# Allegro board Project1.brd
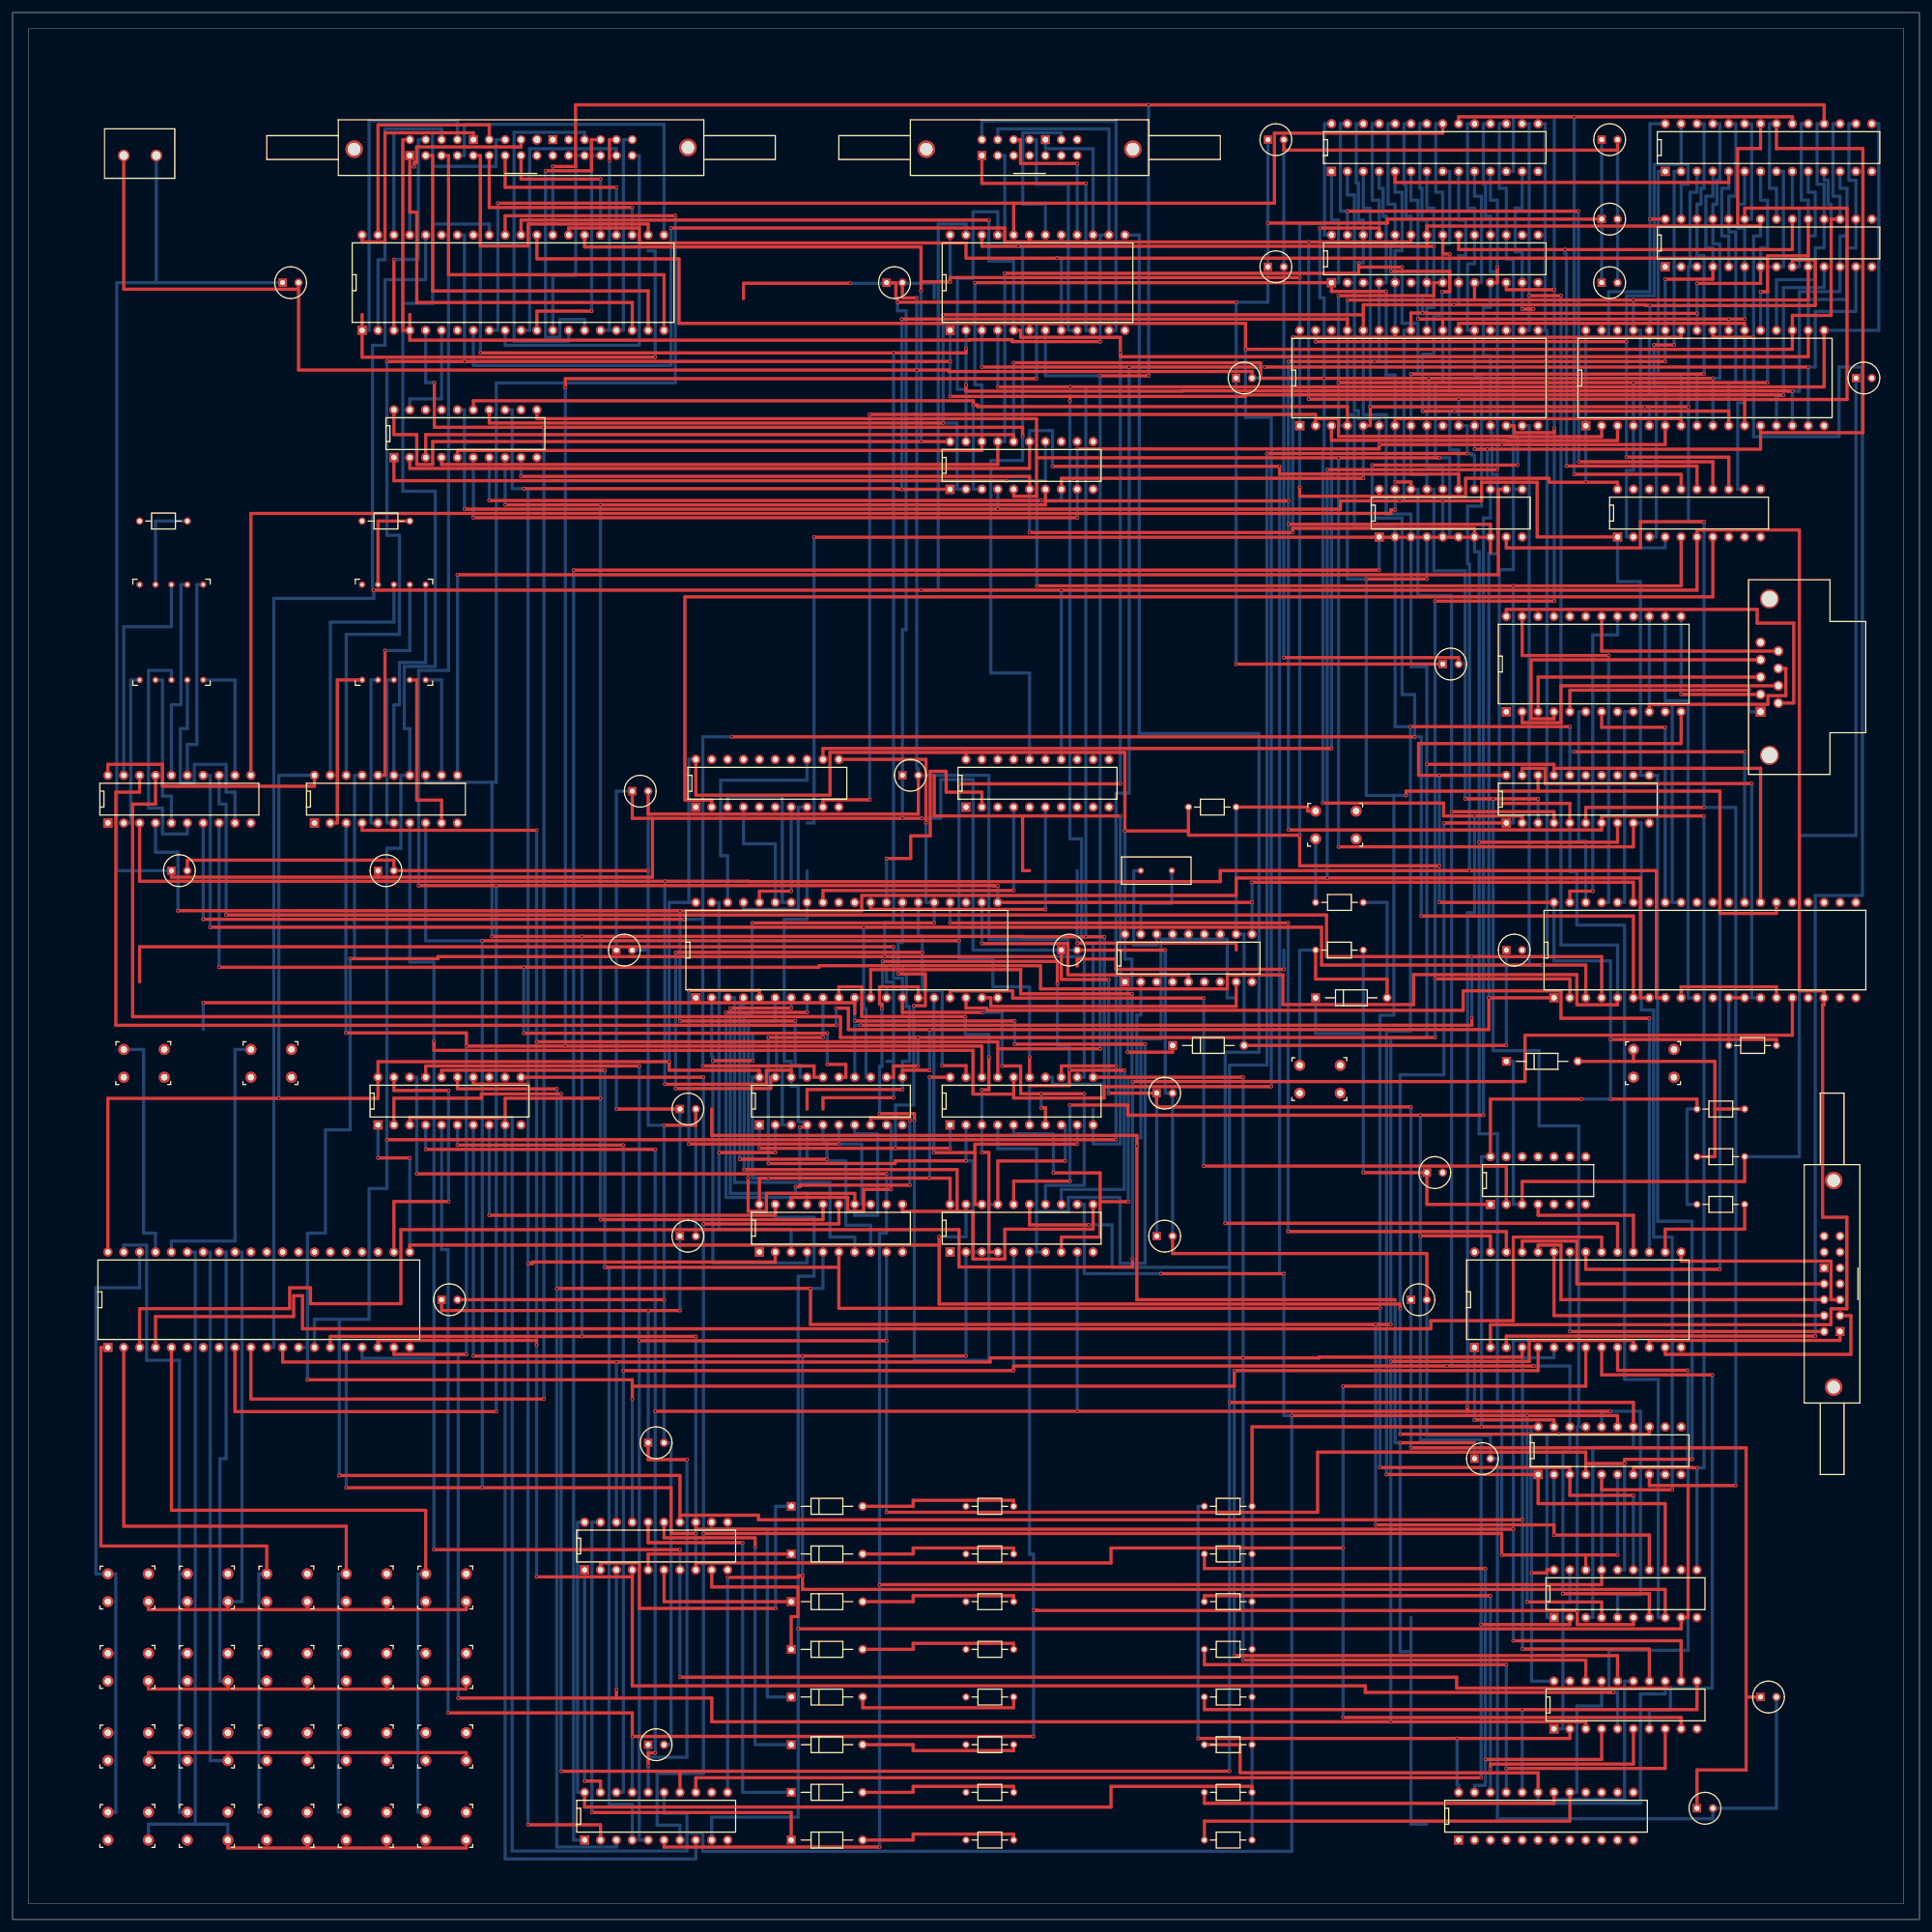
[diagram p0: board, top side]
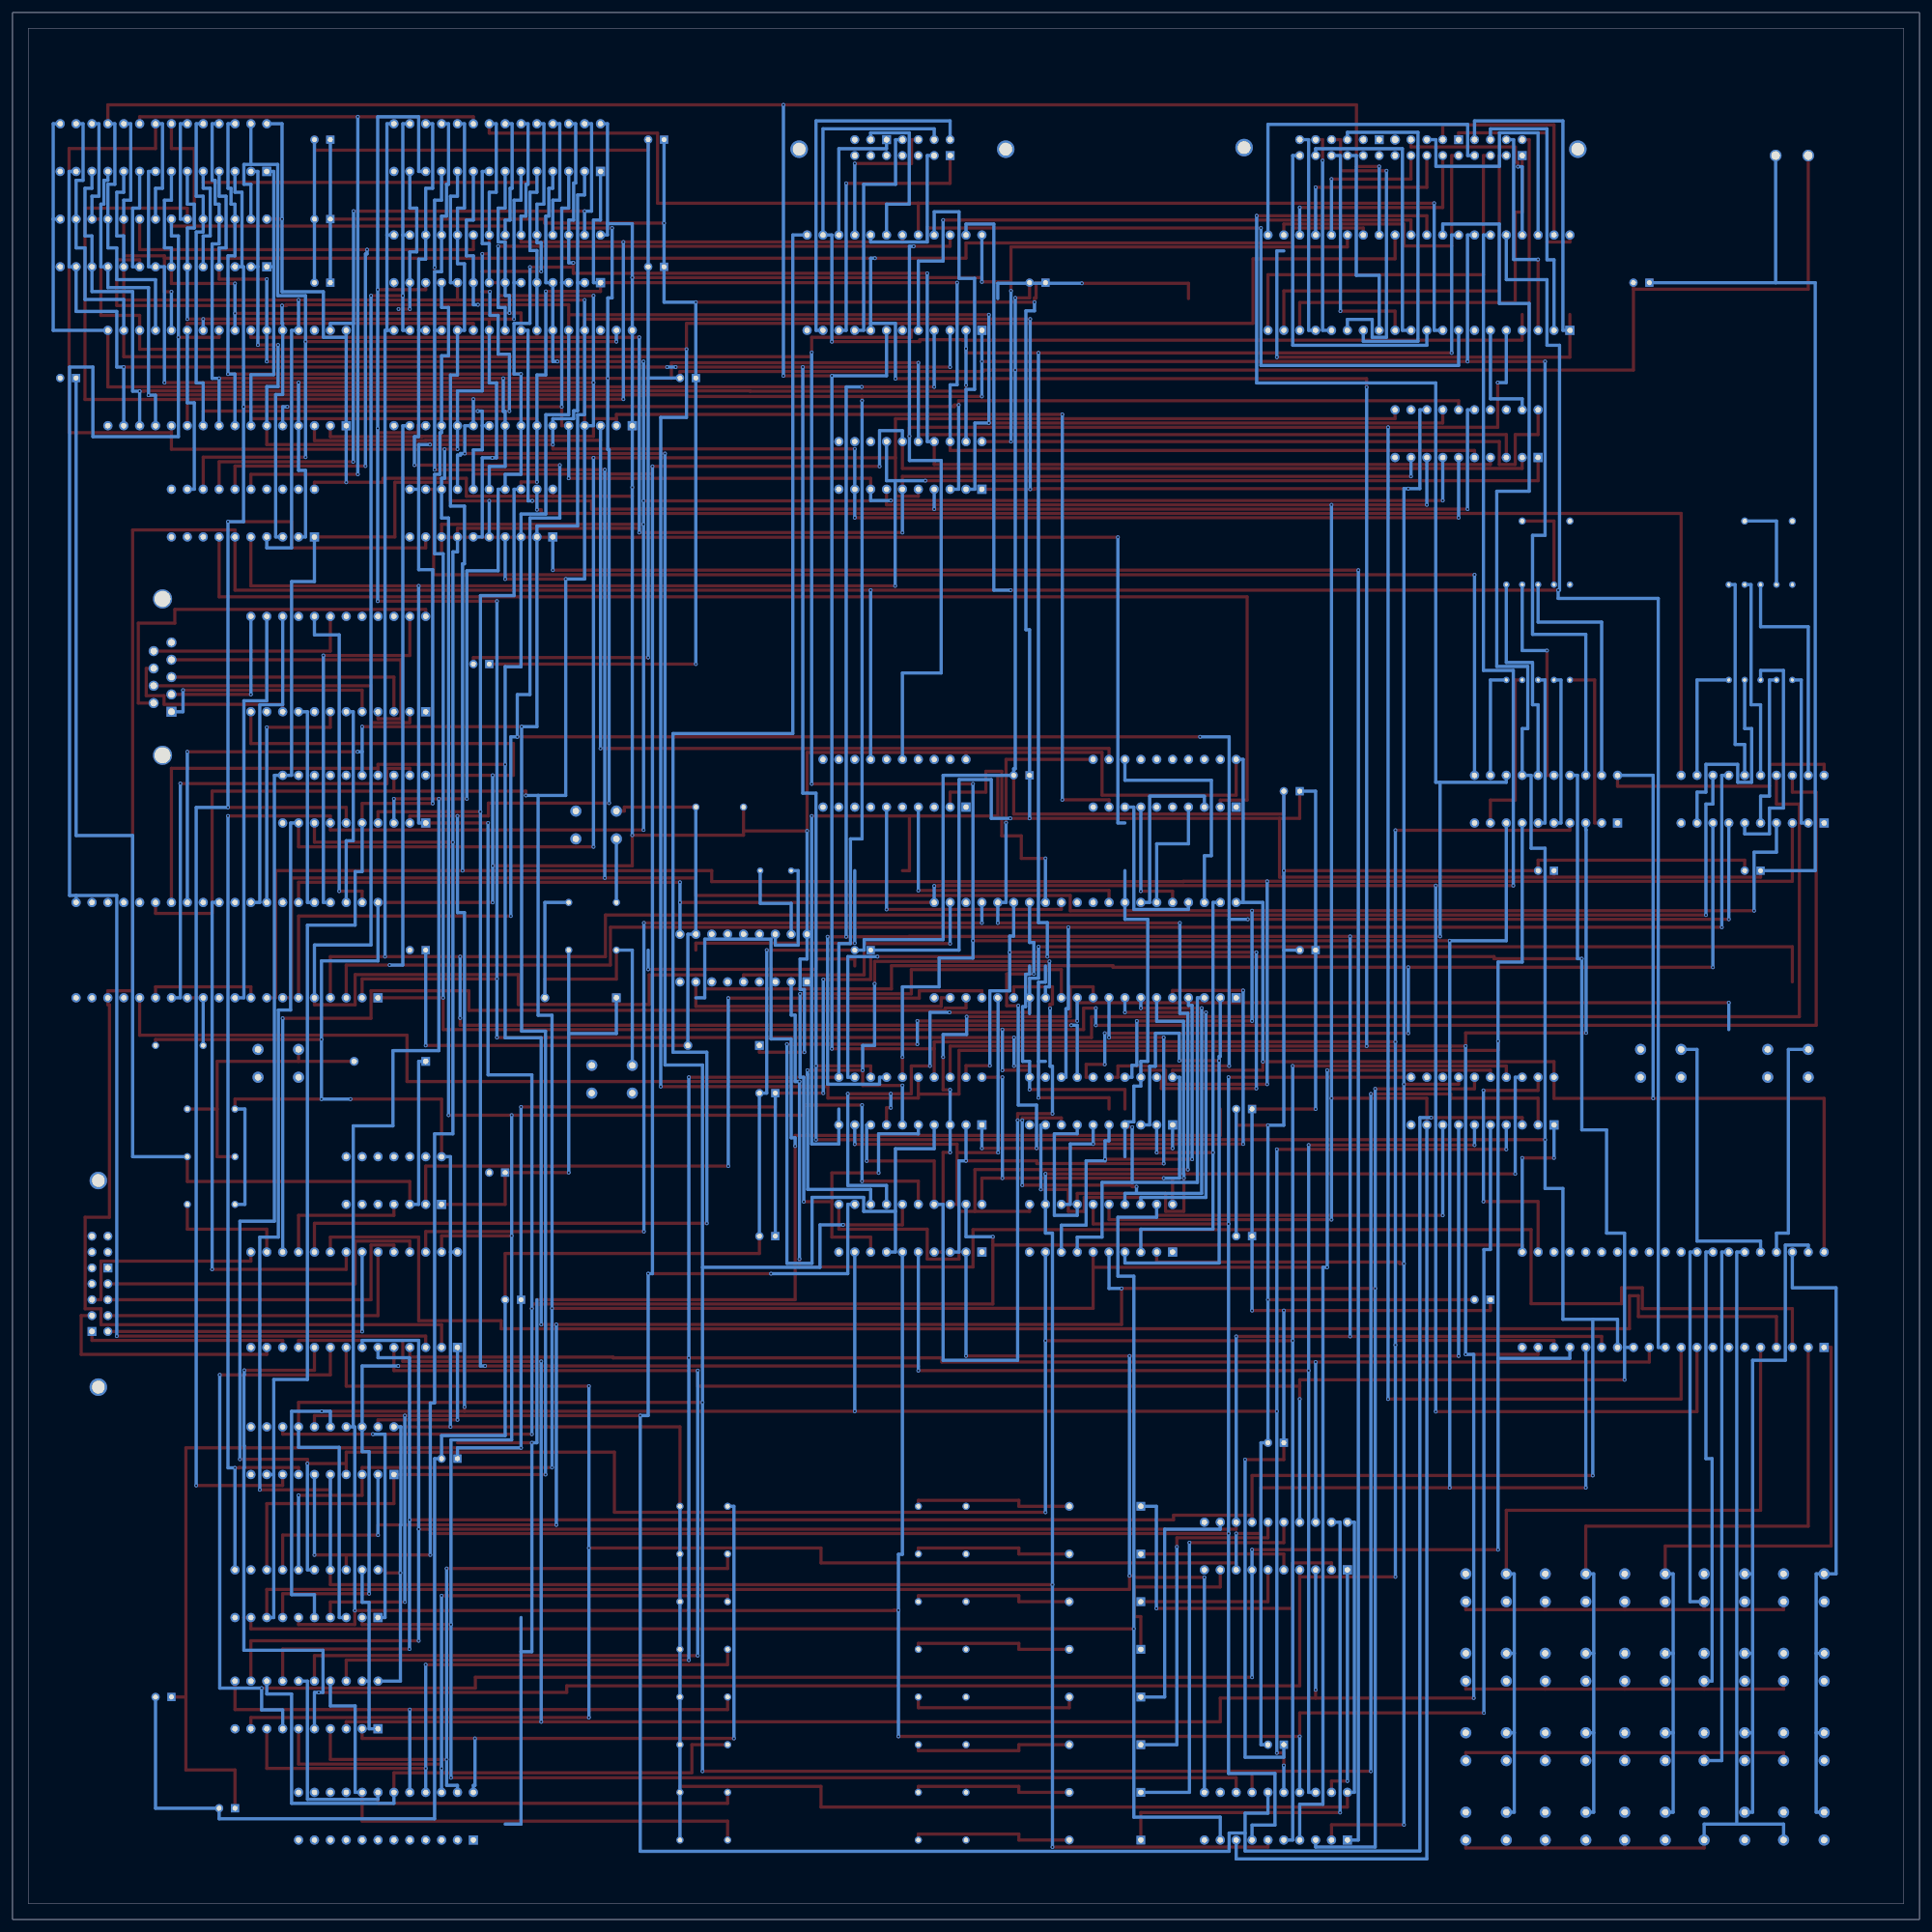
[diagram p1: board, bottom side, seen from below]

Outline 304.8 x 304.8 mm; copper layers: TOP, GND, POWER, BOTTOM. Coordinates in mm from the lower left corner of the outline.
Outline path: rectangle 0,0 304.8,304.8 ; 2.54,302.26 2.54,2.54 302.26,2.54 302.26,302.26 2.54,302.26

## Placement (name value [footprint] x y rotation side)
C1  CAPACITOR  [CPCYL1D200LS100031]  238.76 154.94 0 top
C2  CAPACITOR  [CPCYL1D200LS100031]  226.06 119.38 0 top
C3  CAPACITOR  [CPCYL1D200LS100031]  294.64 246.38 0 top
C4  100u  [CPCYL1D200LS100031]  228.6 200.66 0 top
C5  0.1u  [CPCYL1D200LS100031]  43.18 261.62 0 top
C6  0.1u  [CPCYL1D200LS100031]  200.66 284.48 0 top
C7  0.1u  [CPCYL1D200LS100031]  200.66 264.16 0 top
C8  0.1u  [CPCYL1D200LS100031]  195.58 246.38 0 top
C9  0.1u  [CPCYL1D200LS100031]  254 284.48 0 top
C10  0.1u  [CPCYL1D200LS100031]  254 271.78 0 top
C11  0.1u  [CPCYL1D200LS100031]  254 261.62 0 top
C12  0.1u  [CPCYL1D200LS100031]  99.06 180.34 0 top
C13  0.1u  [CPCYL1D200LS100031]  96.52 154.94 0 top
C14  0.1u  [CPCYL1D200LS100031]  106.68 129.54 0 top
C15  0.1u  [CPCYL1D200LS100031]  106.68 109.22 0 top
C16  0.1u  [CPCYL1D200LS100031]  182.88 109.22 0 top
C17  0.1u  [CPCYL1D200LS100031]  182.88 132.08 0 top
C18  0.1u  [CPCYL1D200LS100031]  167.64 154.94 0 top
C19  0.1u  [CPCYL1D200LS100031]  142.24 182.88 0 top
C20  0.1u  [CPCYL1D200LS100031]  25.4 167.64 0 top
C21  0.1u  [CPCYL1D200LS100031]  58.42 167.64 0 top
C22  0.1u  [CPCYL1D200LS100031]  68.58 99.06 0 top
C23  0.1u  [CPCYL1D200LS100031]  101.6 76.2 0 top
C24  0.1u  [CPCYL1D200LS100031]  101.6 27.94 0 top
C25  0.1u  [CPCYL1D200LS100031]  269.24 17.78 0 top
C26  0.1u  [CPCYL1D200LS100031]  279.4 35.56 0 top
C27  0.1u  [CPCYL1D200LS100031]  139.7 261.62 0 top
C28  0.1u  [CPCYL1D200LS100031]  233.68 73.66 0 top
C29  0.1u  [CPCYL1D200LS100031]  223.52 99.06 0 top
D1  DIODE  [DAX1DO35]  124.46 66.04 0 top
D2  DIODE  [DAX1DO35]  124.46 58.42 0 top
D3  DIODE  [DAX1DO35]  124.46 50.8 0 top
D4  DIODE  [DAX1DO35]  124.46 43.18 0 top
D5  DIODE  [DAX1DO35]  124.46 35.56 0 top
D6  DIODE  [DAX1DO35]  124.46 27.94 0 top
D7  DIODE  [DAX1DO35]  124.46 20.32 0 top
D8  DIODE  [DAX1DO35]  124.46 12.7 0 top
D9  DIODE  [DAX1DO35]  185.42 139.7 0 top
D10  DIODE  [DAX1DO35]  208.28 147.32 0 top
D11  DIODE  [DAX1DO35]  238.76 137.16 0 top
J1  HEADER 7X2  [TYCO100VH14J7]  154.94 281.94 0 top
J2  HEADER 15X2  [TYCO100VH30]  63.5 281.94 0 top
J3  HEADER 7X2  [TYCO100VH14J7]  292.1 93.98 90 top
J4  CON2  [PWR_TRM_BLK]  17.78 281.94 0 top
J5  CONN DSUB 9-P  [DSUBRP318TM9]  279.4 193.04 90 top
R1  RESISTOR  [AX300X100028]  190.5 12.7 0 top
R2  RESISTOR  [AX300X100028]  190.5 20.32 0 top
R3  RESISTOR  [AX300X100028]  190.5 27.94 0 top
R4  RESISTOR  [AX300X100028]  190.5 35.56 0 top
R5  RESISTOR  [AX300X100028]  190.5 43.18 0 top
R6  RESISTOR  [AX300X100028]  190.5 50.8 0 top
R7  RESISTOR  [AX300X100028]  190.5 58.42 0 top
R8  RESISTOR  [AX300X100028]  190.5 66.04 0 top
R9  RESISTOR  [AX300X100028]  152.4 66.04 0 top
R10  RESISTOR  [AX300X100028]  152.4 58.42 0 top
R11  RESISTOR  [AX300X100028]  152.4 50.8 0 top
R12  RESISTOR  [AX300X100028]  152.4 43.18 0 top
R13  RESISTOR  [AX300X100028]  152.4 35.56 0 top
R14  RESISTOR  [AX300X100028]  152.4 27.94 0 top
R15  RESISTOR  [AX300X100028]  152.4 20.32 0 top
R16  RESISTOR  [AX300X100028]  152.4 12.7 0 top
R17  RESISTOR  [AX300X100028]  187.96 177.8 0 top
R18  RESISTOR  [AX300X100028]  208.28 162.56 0 top
R19  RESISTOR  [AX300X100028]  208.28 154.94 0 top
R20  RESISTOR  [AX300X100028]  269.24 129.54 0 top
R21  RESISTOR  [AX300X100028]  269.24 121.92 0 top
R22  RESISTOR  [AX300X100028]  269.24 114.3 0 top
R23  RESISTOR  [AX300X100028]  20.32 223.52 0 top
R24  RESISTOR  [AX300X100028]  55.88 223.52 0 top
R25  RESISTOR  [AX300X100028]  274.32 139.7 0 top
SW1  SW DIP-12  [DIP10024W300L1275]  231.14 12.7 0 top
SW2  SW TACT-SPST-2/SM  [PTS645]  208.28 172.72 0 top
SW3  SW TACT-SPST-2  [PTS645]  205.74 132.08 0 top
SW4  SW TACT-SPST-2  [PTS645]  259.08 134.62 0 top
SW5  SW TACT-SPST-2  [PTS645]  15.24 50.8 0 top
SW6  SW TACT-SPST-2  [PTS645]  27.94 50.8 0 top
SW7  SW TACT-SPST-2  [PTS645]  40.64 50.8 0 top
SW8  SW TACT-SPST-2  [PTS645]  53.34 50.8 0 top
SW9  SW TACT-SPST-2  [PTS645]  66.04 50.8 0 top
SW10  SW TACT-SPST-2  [PTS645]  15.24 38.1 0 top
SW11  SW TACT-SPST-2  [PTS645]  27.94 38.1 0 top
SW12  SW TACT-SPST-2  [PTS645]  40.64 38.1 0 top
SW13  SW TACT-SPST-2  [PTS645]  53.34 38.1 0 top
SW14  SW TACT-SPST-2  [PTS645]  66.04 38.1 0 top
SW15  SW TACT-SPST-2  [PTS645]  17.78 134.62 0 top
SW16  SW TACT-SPST-2  [PTS645]  38.1 134.62 0 top
SW17  SW TACT-SPST-2  [PTS645]  15.24 25.4 0 top
SW18  SW TACT-SPST-2  [PTS645]  27.94 25.4 0 top
SW19  SW TACT-SPST-2  [PTS645]  40.64 25.4 0 top
SW20  SW TACT-SPST-2  [PTS645]  53.34 25.4 0 top
SW21  SW TACT-SPST-2  [PTS645]  66.04 25.4 0 top
SW22  SW TACT-SPST-2  [PTS645]  15.24 12.7 0 top
SW23  SW TACT-SPST-2  [PTS645]  27.94 12.7 0 top
SW24  SW TACT-SPST-2  [PTS645]  40.64 12.7 0 top
SW25  SW TACT-SPST-2  [PTS645]  53.34 12.7 0 top
SW26  SW TACT-SPST-2  [PTS645]  66.04 12.7 0 top
U1  74LS244  [DIP10020W300L1000]  246.38 30.48 0 top
U2  16L8  [DIP10020W300L1000]  246.38 48.26 0 top
U3  74LS374  [DIP10020W300L1000]  91.44 55.88 0 top
U4  16L8  [DIP10020W300L1000]  91.44 12.7 0 top
U5  8086MIN  [DIP10040W600L2025]  109.22 147.32 0 top
U6  8284A  [DIP10018W300L900]  177.8 149.86 0 top
U7  74LS14  [DIP10014W300L700]  236.22 114.3 0 top
U8  8254  [DIP10024W600L1200]  149.86 254 0 top
U9  16L8  [DIP10020W300L1000]  149.86 228.6 0 top
U10  82C55  [DIP10040W600L2025]  55.88 254 0 top
U11  16L8  [DIP10020W300L1000]  60.96 233.68 0 top
U12  8259A  [DIP10028W600L1400]  233.68 91.44 0 top
U13  16L8  [DIP10020W300L1000]  243.84 71.12 0 top
U14  8279  [DIP10040W600L2025]  15.24 91.44 0 top
U15  16L8  [DIP10020W300L1000]  58.42 127 0 top
U16  74LS373  [DIP10020W300L1000]  109.22 177.8 0 top
U17  74LS373  [DIP10020W300L1000]  119.38 106.68 0 top
U18  74LS373  [DIP10020W300L1000]  149.86 106.68 0 top
U19  74LS245  [DIP10020W300L1000]  119.38 127 0 top
U20  74LS244  [DIP10020W300L1000]  152.4 177.8 0 top
U21  74LS245  [DIP10020W300L1000]  149.86 127 0 top
U22  74LS374  [DIP10020W300L1000]  15.24 175.26 0 top
U23  7 Segment LED  [LED_HDSP_H101]  20.32 198.12 0 top
U24  74LS374  [DIP10020W300L1000]  48.26 175.26 0 top
U25  7 Segment LED  [LED_HDSP_H101]  55.88 198.12 0 top
U26  16L8  [DIP10020W300L1000]  218.44 220.98 0 top
U27  16L8  [DIP10020W300L1000]  256.54 220.98 0 top
U28  CY7C199  [DIP10028W300L1400]  210.82 279.4 0 top
U29  CY7C199  [DIP10028W300L1400]  264.16 279.4 0 top
U30  28F010  [DIP10032W600L1600]  251.46 238.76 0 top
U31  CY7C199  [DIP10028W300L1400]  210.82 261.62 0 top
U32  CY7C199  [DIP10028W300L1400]  264.16 264.16 0 top
U33  28F010  [DIP10032W600L1600]  205.74 238.76 0 top
U34  MAX235  [DIP10024W600L1200]  238.76 193.04 0 top
U35  PC16550D  [DIP10040W600L2025]  246.38 147.32 0 top
U36  16L8  [DIP10020W300L1000]  238.76 175.26 0 top
Y1  CRYSTAL  [XTAL_FOX]  180.34 167.64 0 top

## Library data of the parts
C1-C3 C5-C29 = CAPACITOR
C4 = CAPACITOR_1
D1-D11 = DIODE
J1 J3 = HEADER 7X2
J2 = HEADER 15X2
J4 = CON2
J5 = CONN DSUB 9-P
R1-R25 = RESISTOR
SW1 = SW DIP-12
SW2 = SW TACT-SPST-2/SM
SW3-SW26 = SW TACT-SPST-2
U1 U20 = 74LS244
U2 = 16L8_4
U3 U22 U24 = 74LS374
U4 = 16L8_6
U5 = 8086MIN
U6 = 8284A
U7 = 74LS14
U8 = 8254
U9 U26 = 16L8_5
U10 = 82C55
U11 U15 = 16L8_1
U12 = 8259A
U13 U36 = 16L8_2
U14 = 8279
U16-U18 = 74LS373
U19 U21 = 74LS245
U23 U25 = 7 Segment LED
U27 = 16L8
U28 U29 U31 U32 = CY7C199
U30 U33 = 28F010
U34 = MAX235
U35 = PC16550D
Y1 = CRYSTAL

## Footprints (pads in the part's own frame, mm; a bottom-side part is the same pattern mirrored in y, then rotated)
AX300X100028
  round 1.143 hole 0.711: 1(0,0) 2(7.62,0)
CPCYL1D200LS100031
  rect 1.321x1.321 hole 0.787: 1(0,0)
  round 1.321 hole 0.787: 2(2.54,0)
DAX1DO35
  rect 1.397x1.397 hole 0.864: 1(0,0)
  round 1.397 hole 0.864: 2(11.43,0)
DIP10014W300L700
  rect 1.473x1.473 hole 0.864: 1(0,0)
  round 1.473 hole 0.864: 2(2.54,0) 3(5.08,0) 4(7.62,0) 5(10.16,0) 6(12.7,0) 7(15.24,0) 8(15.24,7.62) 9(12.7,7.62) 10(10.16,7.62) 11(7.62,7.62) 12(5.08,7.62) 13(2.54,7.62) 14(0,7.62)
DIP10018W300L900
  rect 1.473x1.473 hole 0.864: 1(0,0)
  round 1.473 hole 0.864: 2(2.54,0) 3(5.08,0) 4(7.62,0) 5(10.16,0) 6(12.7,0) 7(15.24,0) 8(17.78,0) 9(20.32,0) 10(20.32,7.62) 11(17.78,7.62) 12(15.24,7.62) 13(12.7,7.62) 14(10.16,7.62) 15(7.62,7.62) 16(5.08,7.62) 17(2.54,7.62) 18(0,7.62)
DIP10020W300L1000
  rect 1.473x1.473 hole 0.864: 1(0,0)
  round 1.473 hole 0.864: 2(2.54,0) 3(5.08,0) 4(7.62,0) 5(10.16,0) 6(12.7,0) 7(15.24,0) 8(17.78,0) 9(20.32,0) 10(22.86,0) 11(22.86,7.62) 12(20.32,7.62) 13(17.78,7.62) 14(15.24,7.62) 15(12.7,7.62) 16(10.16,7.62) 17(7.62,7.62) 18(5.08,7.62) 19(2.54,7.62) 20(0,7.62)
DIP10024W300L1275
  rect 1.473x1.473 hole 0.864: 1(0,0)
  round 1.473 hole 0.864: 2(2.54,0) 3(5.08,0) 4(7.62,0) 5(10.16,0) 6(12.7,0) 7(15.24,0) 8(17.78,0) 9(20.32,0) 10(22.86,0) 11(25.4,0) 12(27.94,0) 13(27.94,7.62) 14(25.4,7.62) 15(22.86,7.62) 16(20.32,7.62) 17(17.78,7.62) 18(15.24,7.62) 19(12.7,7.62) 20(10.16,7.62) 21(7.62,7.62) 22(5.08,7.62) 23(2.54,7.62) 24(0,7.62)
DIP10024W600L1200
  rect 1.473x1.473 hole 0.864: 1(0,0)
  round 1.473 hole 0.864: 2(2.54,0) 3(5.08,0) 4(7.62,0) 5(10.16,0) 6(12.7,0) 7(15.24,0) 8(17.78,0) 9(20.32,0) 10(22.86,0) 11(25.4,0) 12(27.94,0) 13(27.94,15.24) 14(25.4,15.24) 15(22.86,15.24) 16(20.32,15.24) 17(17.78,15.24) 18(15.24,15.24) 19(12.7,15.24) 20(10.16,15.24) 21(7.62,15.24) 22(5.08,15.24) 23(2.54,15.24) 24(0,15.24)
DIP10028W300L1400
  rect 1.473x1.473 hole 0.864: 1(0,0)
  round 1.473 hole 0.864: 2(2.54,0) 3(5.08,0) 4(7.62,0) 5(10.16,0) 6(12.7,0) 7(15.24,0) 8(17.78,0) 9(20.32,0) 10(22.86,0) 11(25.4,0) 12(27.94,0) 13(30.48,0) 14(33.02,0) 15(33.02,7.62) 16(30.48,7.62) 17(27.94,7.62) 18(25.4,7.62) 19(22.86,7.62) 20(20.32,7.62) 21(17.78,7.62) 22(15.24,7.62) 23(12.7,7.62) 24(10.16,7.62) 25(7.62,7.62) 26(5.08,7.62) 27(2.54,7.62) 28(0,7.62)
DIP10028W600L1400
  rect 1.473x1.473 hole 0.864: 1(0,0)
  round 1.473 hole 0.864: 2(2.54,0) 3(5.08,0) 4(7.62,0) 5(10.16,0) 6(12.7,0) 7(15.24,0) 8(17.78,0) 9(20.32,0) 10(22.86,0) 11(25.4,0) 12(27.94,0) 13(30.48,0) 14(33.02,0) 15(33.02,15.24) 16(30.48,15.24) 17(27.94,15.24) 18(25.4,15.24) 19(22.86,15.24) 20(20.32,15.24) 21(17.78,15.24) 22(15.24,15.24) 23(12.7,15.24) 24(10.16,15.24) 25(7.62,15.24) 26(5.08,15.24) 27(2.54,15.24) 28(0,15.24)
DIP10032W600L1600
  rect 1.473x1.473 hole 0.864: 1(0,0)
  round 1.473 hole 0.864: 2(2.54,0) 3(5.08,0) 4(7.62,0) 5(10.16,0) 6(12.7,0) 7(15.24,0) 8(17.78,0) 9(20.32,0) 10(22.86,0) 11(25.4,0) 12(27.94,0) 13(30.48,0) 14(33.02,0) 15(35.56,0) 16(38.1,0) 17(38.1,15.24) 18(35.56,15.24) 19(33.02,15.24) 20(30.48,15.24) 21(27.94,15.24) 22(25.4,15.24) 23(22.86,15.24) 24(20.32,15.24) 25(17.78,15.24) 26(15.24,15.24) 27(12.7,15.24) 28(10.16,15.24) 29(7.62,15.24) 30(5.08,15.24) 31(2.54,15.24) 32(0,15.24)
DIP10040W600L2025
  rect 1.473x1.473 hole 0.864: 1(0,0)
  round 1.473 hole 0.864: 2(2.54,0) 3(5.08,0) 4(7.62,0) 5(10.16,0) 6(12.7,0) 7(15.24,0) 8(17.78,0) 9(20.32,0) 10(22.86,0) 11(25.4,0) 12(27.94,0) 13(30.48,0) 14(33.02,0) 15(35.56,0) 16(38.1,0) 17(40.64,0) 18(43.18,0) 19(45.72,0) 20(48.26,0) 21(48.26,15.24) 22(45.72,15.24) 23(43.18,15.24) 24(40.64,15.24) 25(38.1,15.24) 26(35.56,15.24) 27(33.02,15.24) 28(30.48,15.24) 29(27.94,15.24) 30(25.4,15.24) 31(22.86,15.24) 32(20.32,15.24) 33(17.78,15.24) 34(15.24,15.24) 35(12.7,15.24) 36(10.16,15.24) 37(7.62,15.24) 38(5.08,15.24) 39(2.54,15.24) 40(0,15.24)
DSUBRP318TM9
  rect 1.6x1.6 hole 1.067: 1(0,0)
  round 1.6 hole 1.067: 2(2.769,0) 3(5.537,0) 4(8.306,0) 5(11.074,0) 6(1.384,-2.845) 7(4.153,-2.845) 8(6.921,-2.845) 9(9.69,-2.845)
  round 3.048 hole 2.54: HOLE49(-6.96,-1.422) HOLE50(18.034,-1.422)
LED_HDSP_H101
  round 1.016 hole 0.508: 1(0,0) 2(2.54,0) 3(5.08,0) 4(7.62,0) 5(10.16,0) 6(10.16,15.24) 7(7.62,15.24) 8(5.08,15.24) 9(2.54,15.24) 10(0,15.24)
PTS645
  round 1.778 hole 1.029: 1(0,0) 2(6.477,0) 3(0,4.445) 4(6.477,4.445)
PWR_TRM_BLK
  round 1.867 hole 1.359: 1(0,0) 2(5.207,0)
TYCO100VH14J7
  rect 1.422x1.422 hole 0.914: 1(0,0) 10(10.16,2.54)
  round 1.422 hole 0.914: 2(0,2.54) 3(2.54,0) 4(2.54,2.54) 5(5.08,0) 6(5.08,2.54) 7(7.62,0) 8(7.62,2.54) 9(10.16,0) 11(12.7,0) 12(12.7,2.54) 13(15.24,0) 14(15.24,2.54)
  round 2.794 hole 2.032: HOLE1(-8.89,1.016) HOLE2(24.13,1.016)
TYCO100VH30
  rect 1.422x1.422 hole 0.914: 1(0,0) 10(10.16,2.54) 20(22.86,2.54)
  round 1.422 hole 0.914: 2(0,2.54) 3(2.54,0) 4(2.54,2.54) 5(5.08,0) 6(5.08,2.54) 7(7.62,0) 8(7.62,2.54) 9(10.16,0) 11(12.7,0) 12(12.7,2.54) 13(15.24,0) 14(15.24,2.54) 15(17.78,0) 16(17.78,2.54) 17(20.32,0) 19(22.86,0) 21(25.4,0) 22(25.4,2.54) 23(27.94,0) 24(27.94,2.54) 25(30.48,0) 26(30.48,2.54) 27(33.02,0) 28(33.02,2.54) 29(35.56,0) 30(35.56,2.54)
  round 1.575 hole 1.067: 18(20.32,2.54)
  round 2.794 hole 2.032: HOLE1(-8.89,1.016) HOLE2(44.45,1.27)
XTAL_FOX
  round 1.016 hole 0.508: 1(0,0) 2(4.953,0)

## Nets
GND: C1.2 C2.2 C3.2 J5.5 R9.1 R10.1 R11.1 R12.1 R13.1 R14.1 R15.1 R16.1 R23.1 R24.1 SW1.1(A1) SW1.2(A2) SW1.3(A3) SW1.4(A4) SW1.5(A5) SW1.6(A6) SW1.7(A7) SW1.8(A8) SW3.2 SW4.2 SW15.2 SW16.2 U1.10 U2.10 U3.10 U3.11(CLK) U4.10 U5.1 U5.20 U6.1(CSYNC) U6.9 U6.13(F/C\) U7.7 U8.12 U9.10 U10.7 U11.10 U12.14 U13.10 U14.20 U15.10 U16.1(O\E\) U16.10 U17.1(O\E\) U17.10 U18.1(O\E\) U18.10 U19.10 U20.1(1\O\E\) U20.10 U20.19(2\O\E\) U21.10 U22.1(O\E\) U22.10 U24.1(O\E\) U24.10 U26.10 U27.10 U28.14 U29.14 U30.16 U31.14 U32.14 U33.16 U34.11 U34.20(E\N\) U34.21(SD) U35.19(WR) U35.20 U35.22(RD) U35.25(A\D\S\) U36.10
VCC: D9.1(K) R1.2 R2.2 R3.2 R4.2 R5.2 R6.2 R7.2 R8.2 R17.1 R20.1 R22.1 R25.2 U1.20 U2.20 U3.20 U4.20 U5.40 U6.18 U7.14 U8.24 U9.20 U10.26 U11.20 U12.28 U13.20 U14.40 U15.20 U16.20 U17.20 U18.20 U19.20 U20.20 U21.20 U22.20 U24.20 U26.20 U27.20 U28.28(VCC) U29.28(VCC) U30.1(VPP) U30.32 U31.28(VCC) U32.28(VCC) U33.1(VPP) U33.32 U34.12 U35.40 U36.20
A0: U2.1(I1) U9.14(O\6\) U11.1(I1) U13.13(O\7\) U14.21(A0) U15.1(I1) U18.19(Q7) U27.5(I5) U36.1(I1)
A1: U2.2(I2) U4.13(O\7\) U8.20(A1) U10.9(A0) U12.27(A0) U18.16(Q6) U26.13(O\7\) U28.21(A0) U29.21(A0) U30.12(A0) U31.21(A0) U32.21(A0) U33.12(A0)
A2: U2.3(I3) U4.14(O\6\) U8.19(A0) U10.8(A1) U13.14(O\6\) U15.2(I2) U18.15(Q5) U26.14(O\6\) U28.23(A1) U29.23(A1) U30.11(A1) U31.23(A1) U32.23(A1) U33.11(A1)
A3: U2.4(I4) U4.15(O\5\) U9.15(O\5\) U11.2(I2) U13.15(O\5\) U15.3(I3) U18.12(Q4) U26.15(O\5\) U28.24(A2) U29.24(A2) U30.10(A2) U31.24(A2) U32.24(A2) U33.10(A2)
A4: U2.5(I5) U4.16(O\4\) U9.16(O\4\) U11.3(I3) U13.16(O\4\) U15.4(I4) U18.9(Q3) U26.16(O\4\) U28.25(A3) U29.25(A3) U30.9(A3) U31.25(A3) U32.25(A3) U33.9(A3) U36.2(I2)
A5: U2.6(I6) U4.17(O\3\) U9.17(O\3\) U11.4(I4) U13.17(O\3\) U15.5(I5) U18.6(Q2) U26.17(O\3\) U28.26(A4) U29.26(A4) U30.8(A4) U31.26(A4) U32.26(A4) U33.8(A4) U36.3(I3)
A6: U2.7(I7) U4.18(O\2\) U9.18(O\2\) U11.5(I5) U13.18(O\2\) U15.6(I6) U18.5(Q1) U26.18(O\2\) U28.1(A5) U29.1(A5) U30.7(A5) U31.1(A5) U32.1(A5) U33.7(A5) U36.4(I4)
A7: U2.8(I8) U4.11(I10) U9.9(I9) U11.6(I6) U13.9(I9) U15.7(I7) U18.2(Q0) U26.11(I10) U28.2(A6) U29.2(A6) U30.6(A6) U31.2(A6) U32.2(A6) U33.6(A6) U36.5(I5)
A8: U2.9(I9) U4.9(I9) U9.8(I8) U11.7(I7) U13.8(I8) U15.8(I8) U17.19(Q7) U26.9(I9) U28.3(A7) U29.3(A7) U30.5(A7) U31.3(A7) U32.3(A7) U33.5(A7) U36.6(I6)
A9: U2.11(I10) U4.8(I8) U9.7(I7) U11.8(I8) U13.7(I7) U15.9(I9) U17.16(Q6) U26.8(I8) U28.4(A8) U29.4(A8) U30.27(A8) U31.4(A8) U32.4(A8) U33.27(A8) U36.7(I7)
A10: U2.18(O\2\) U4.7(I7) U9.6(I6) U11.9(I9) U13.6(I6) U15.11(I10) U17.15(Q5) U26.7(I7) U28.5(A9) U29.5(A9) U30.26(A9) U31.5(A9) U32.5(A9) U33.26(A9) U36.8(I8)
A11: U2.17(O\3\) U4.6(I6) U9.5(I5) U11.11(I10) U13.5(I5) U15.18(O\2\) U17.12(Q4) U26.6(I6) U28.6(A10) U29.6(A10) U30.23(A10) U31.6(A10) U32.6(A10) U33.23(A10) U36.9(I9)
A12: U2.16(O\4\) U4.5(I5) U9.4(I4) U11.16(O\4\) U13.4(I4) U15.17(O\3\) U17.9(Q3) U26.5(I5) U27.1(I1) U28.7(A11) U29.7(A11) U30.25(A11) U31.7(A11) U32.7(A11) U33.25(A11) U36.11(I10)
A13: U2.15(O\5\) U4.4(I4) U9.3(I3) U11.15(O\5\) U13.3(I3) U15.16(O\4\) U17.6(Q2) U26.4(I4) U27.2(I2) U28.8(A12) U29.8(A12) U30.4(A12) U31.8(A12) U32.8(A12) U33.4(A12) U35.26(A2) U36.18(O\2\)
A14: U2.14(O\6\) U4.3(I3) U9.2(I2) U11.14(O\6\) U13.2(I2) U15.15(O\5\) U17.5(Q1) U26.3(I3) U27.3(I3) U28.9(A13) U29.9(A13) U30.28(A13) U31.9(A13) U32.9(A13) U33.28(A13) U35.27(A1) U36.17(O\3\)
A15: U2.13(O\7\) U4.2(I2) U9.1(I1) U11.13(O\7\) U13.1(I1) U15.14(O\6\) U17.2(Q0) U26.2(I2) U27.4(I4) U28.10(A14) U29.10(A14) U30.29(A14) U31.10(A14) U32.10(A14) U33.29(A14) U35.28(A0) U36.16(O\4\)
A16: U16.12(Q4) U30.3(A15) U33.3(A15)
A17: U16.9(Q3) U30.2(A16) U33.2(A16)
A18: U16.6(Q2)
A19: U16.5(Q1)
AD0: U5.16(AD0) U18.18(D7) U21.9(A7)
AD1: U5.15(AD1) U18.17(D6) U21.8(A6)
AD2: U5.14(AD2) U18.14(D5) U21.7(A5)
AD3: U5.13(AD3) U18.13(D4) U21.6(A4)
AD4: U5.12(AD4) U18.8(D3) U21.5(A3)
AD5: U5.11(AD5) U18.7(D2) U21.4(A2)
AD6: U5.10(AD6) U18.4(D1) U21.3(A1)
AD7: U5.9(AD7) U18.3(D0) U21.2(A0)
AD8: U5.8(AD8) U17.18(D7) U19.9(A7)
AD9: U5.7(AD9) U17.17(D6) U19.8(A6)
AD10: U5.6(AD10) U17.14(D5) U19.7(A5)
AD11: U5.5(AD11) U17.13(D4) U19.6(A4)
AD12: U5.4(AD12) U17.8(D3) U19.5(A3)
AD13: U5.3(AD13) U17.7(D2) U19.4(A2)
AD14: U5.2(AD14) U17.4(D1) U19.3(A1)
AD15: U5.39(AD15) U17.3(D0) U19.2(A0)
ALE: U5.25(ALE) U16.11(L\E\) U17.11(L\E\) U18.11(L\E\)
AS16: U5.38(A16/S3) U16.13(D4)
AS17: U5.37(A17/S4) U16.8(D3)
AS18: U5.36(A18/S5) U16.7(D2)
AS19: U5.35(A19/S6) U16.4(D1)
BCON0: U5.28(M/I\O\) U20.2(A1)
BCON1: U5.32(R\D\) U20.4(A2)
BCON2: U5.29(W\R\) U20.6(A3)
BHE: U16.2(Q0) U27.7(I7)
BHE/S: U5.34(B\H\E\/S7) U16.3(D0)
COUNTER2: U8.13(OUT1) U12.19(IR1)
CTSIN: J5.8 U34.10(R1IN)
D0: U1.18(Y1) U3.18(D7) U8.1(D7) U10.34(D0) U12.4(D7) U14.12(DB0) U21.11(B7) U24.18(D7) U29.11(D0) U30.13(DQ0) U32.11(D0)
D1: U1.16(Y2) U3.17(D6) U8.2(D6) U10.33(D1) U12.5(D6) U14.13(DB1) U21.12(B6) U24.17(D6) U29.12(D1) U30.14(DQ1) U32.12(D1)
D2: U1.14(Y3) U3.14(D5) U8.3(D5) U10.32(D2) U12.6(D5) U14.14(DB2) U21.13(B5) U24.14(D5) U29.13(D2) U30.15(DQ2) U32.13(D2)
D3: U1.12(Y4) U3.13(D4) U8.4(D4) U10.31(D3) U12.7(D4) U14.15(DB3) U21.14(B4) U24.13(D4) U29.15(D3) U30.17(DQ3) U32.15(D3)
D4: U1.9(Y5) U3.8(D3) U8.5(D3) U10.30(D4) U12.8(D3) U14.16(DB4) U21.15(B3) U24.8(D3) U29.16(D4) U30.18(DQ4) U32.16(D4)
D5: U1.7(Y6) U3.7(D2) U8.6(D2) U10.29(D5) U12.9(D2) U14.17(DB5) U21.16(B2) U24.7(D2) U29.17(D5) U30.19(DQ5) U32.17(D5)
D6: U1.5(Y7) U3.4(D1) U8.7(D1) U10.28(D6) U12.10(D1) U14.18(DB6) U21.17(B1) U24.4(D1) U29.18(D6) U30.20(DQ6) U32.18(D6)
D7: U1.3(Y8) U3.3(D0) U8.8(D0) U10.27(D7) U12.11(D0) U14.19(DB7) U21.18(B0) U24.3(D0) U29.19(D7) U30.21(DQ7) U32.19(D7)
D8: U19.11(B7) U22.18(D7) U28.11(D0) U31.11(D0) U33.13(DQ0) U35.1(D0)
D9: U19.12(B6) U22.17(D6) U28.12(D1) U31.12(D1) U33.14(DQ1) U35.2(D1)
D10: U19.13(B5) U22.14(D5) U28.13(D2) U31.13(D2) U33.15(DQ2) U35.3(D2)
D11: U19.14(B4) U22.13(D4) U28.15(D3) U31.15(D3) U33.17(DQ3) U35.4(D3)
D12: U19.15(B3) U22.8(D3) U28.16(D4) U31.16(D4) U33.18(DQ4) U35.5(D4)
D13: U19.16(B2) U22.7(D2) U28.17(D5) U31.17(D5) U33.19(DQ5) U35.6(D5)
D14: U19.17(B1) U22.4(D1) U28.18(D6) U31.18(D6) U33.20(DQ6) U35.7(D6)
D15: U19.18(B0) U22.3(D0) U28.19(D7) U31.19(D7) U33.21(DQ7) U35.8(D7)
DCDIN: J5.1 U34.5(R2IN)
DEN: U5.26(D\E\N\) U19.19(G\) U21.19(G\)
DSRIN: J5.6 U34.24(R3IN)
DT/R: U5.27(DT/R\) U19.1(DIR) U21.1(DIR)
DTR: U34.7(T2IN) U35.33(D\T\R\)
DTROUT: J5.4 U34.4(T2OUT)
INTA: U5.24(I\N\T\A\) U12.26(I\N\T\A\)
INTR: U5.18(INTR) U12.17(INT)
IR3: U12.21(IR3) U35.30(INTR)
IRQ: U12.20(IR2) U14.4(IRQ)
LED 16LS: U4.1(I1) U26.1(I1)
M/IO: U20.18(Y1)
OE: U2.12(O\8\)
PCLK: U6.2(PCLK) U14.3(CLK) U35.16(XIN)
RCLK: U35.9(RCLK) U35.15(B\A\U\D\O\U\T\)
RD: U8.22(R\D\) U10.5(R\D\) U12.3(R\D\) U14.10(R\D\) U20.16(Y2) U28.22(O\E\) U29.22(O\E\) U30.24(O\E\) U31.22(O\E\) U32.22(O\E\) U33.24(O\E\) U35.21(R\D\)
RESET: U5.21(RST) U6.10(RESET) U10.35(RESET) U14.9(RESET) U35.35(MR)
RI: J5.9 U34.18(R4IN)
ROW0: SW5.3 SW10.3 SW17.3 SW22.3 U14.38(RL0)
ROW1: SW6.3 SW11.3 SW18.3 SW23.3 U14.39(RL1)
ROW2: SW7.3 SW12.3 SW19.3 SW24.3 U14.1(RL2)
ROW3: SW8.3 SW13.3 SW20.3 SW25.3 U14.2(RL3)
ROW4: SW9.3 SW14.3 SW21.3 SW26.3 U14.5(RL4)
RTS: U34.15(T3IN) U35.32(R\T\S\)
RTSOUT: J5.7 U34.2(T3OUT)
RXD: J5.2 U34.13(R5IN)
SIN: U34.14(R5OUT) U35.10(SIN)
SOUT: U35.11(SOUT)
TXD: U34.8(T1IN)
TXDOUT: J5.3 U34.3(T1OUT)
WR: U8.23(W\R\) U10.36(W\R\) U12.2(W\R\) U14.11(W\R\) U20.14(Y3) U27.6(I6) U35.18(W\R\)
N141477: U27.14(O\6\) U28.27(W\E\) U30.31(W\E\) U31.27(W\E\)
N141489: U27.13(O\7\) U29.27(W\E\) U32.27(W\E\) U33.31(W\E\)
N141501: U27.16(O\4\) U28.20(C\E\) U29.20(C\E\)
N141507: U27.15(O\5\) U31.20(C\E\) U32.20(C\E\)
N147875: U5.22(READY) U6.5(READY)
N147887: U5.19(CLK) U6.8(CLK)
N147899: C1.1 D9.2(A) R17.2 SW2.3 U6.11(R\E\S\)
N148011: U6.17(X1) Y1.2
N148027: U6.16(X2) Y1.1
N148177: R18.1 SW2.1
N148381: D10.2(A) R18.2 R19.1 SW3.3
N148405: C2.1 D10.1(K) R19.2 U7.1(A)
N148505: U5.17(NMI) U7.2(Y)
N168315: U27.12(O\8\) U30.22(C\E\) U33.22(C\E\)
N177036: U14.22(C\S\) U15.19(O\1\)
N178437: U12.1(C\S\) U13.19(O\1\)
N179842: R22.2 U12.16(SP/E\N\)
N181390: SW5.2 SW6.2 SW7.2 SW8.2 SW9.2 U14.32(SL0)
N181422: SW10.2 SW11.2 SW12.2 SW13.2 SW14.2 U14.33(SL1)
N181446: SW17.2 SW18.2 SW19.2 SW20.2 SW21.2 U14.34(SL2)
N181486: SW22.2 SW23.2 SW24.2 SW25.2 SW26.2 U14.35(SL3)
N183919: D11.2(A) R20.2 R21.1 SW4.3
N183927: C3.1 D11.1(K) R21.2 U7.3(A)
N183971: U7.4(Y) U12.18(IR0)
N184717: SW15.3 U14.37(CN/ST)
N184783: SW16.3 U14.36(SHFT)
N186689: J3.2 U12.22(IR4)
N186702: J3.4 U12.23(IR5)
N186712: J3.6 U12.24(IR6)
N186722: J3.8 U12.25(IR7)
N186732: J3.1 U12.12(CAS0)
N186746: J3.3 U12.13(CAS1)
N186756: J3.5 U12.15(CAS2)
N188257: U8.21(C\S\) U9.19(O\1\)
N188760: J1.1 U8.10(OUT0)
N188785: J1.2 U8.11(G0)
N188795: J1.4 U8.14(G1)
N188805: J1.6 U8.16(G2)
N188815: J1.8 U8.9(CLK0)
N188885: J1.10 U8.15(CLK1)
N188895: J1.12 U8.18(CLK2)
N188905: J1.3 U8.17(OUT2)
N200697: U35.14(C\S\2\) U36.19(O\1\)
N200729: R25.1 U35.12(CS0) U35.13(CS1)
N201207: U22.2(Q0) U23.1(D0)
N201215: U22.5(Q1) U23.2(D1)
N201223: U22.6(Q2) U23.3(D2)
N201231: U22.9(Q3) U23.4(D3)
N201239: U22.12(Q4) U23.5(D4)
N201247: U22.15(Q5) U23.6(D5)
N201255: U22.16(Q6) U23.7(D6)
N201263: U22.19(Q7) U23.8(D7)
N201271: U24.2(Q0) U25.1(D0)
N201289: U24.5(Q1) U25.2(D1)
N201297: U24.6(Q2) U25.3(D2)
N201305: U24.9(Q3) U25.4(D3)
N201313: U24.12(Q4) U25.5(D4)
N201321: U24.15(Q5) U25.6(D5)
N201329: U24.16(Q6) U25.7(D6)
N201337: U24.19(Q7) U25.8(D7)
N201797: R23.2 U23.9(E)
N201801: R24.2 U25.9(E)
N201878: U22.11(CLK) U26.19(O\1\)
N201893: U24.11(CLK) U26.12(O\8\)
N202791: U34.9(R1OUT) U35.36(C\T\S\)
N202803: U34.6(R2OUT) U35.38(D\C\D\)
N202815: U34.23(R3OUT) U35.37(D\S\R\)
N202844: U34.17(R4OUT) U35.39(R\I\)
N207750: R8.1 SW1.24(B1) U1.2(A1)
N207762: R7.1 SW1.23(B2) U1.4(A2)
N207774: R6.1 SW1.22(B3) U1.6(A3)
N207786: R5.1 SW1.21(B4) U1.8(A4)
N207798: R4.1 SW1.20(B5) U1.11(A5)
N207810: R3.1 SW1.19(B6) U1.13(A6)
N207822: R2.1 SW1.18(B7) U1.15(A7)
N208017: U1.1(1\O\E\) U1.19(2\O\E\) U2.19(O\1\)
N208257: R1.1 SW1.17(B8) U1.17(A8)
N212011: U3.1(O\E\) U4.19(O\1\)
N212495: D1.1(K) U3.2(Q0)
N212502: D2.1(K) U3.5(Q1)
N212509: D3.1(K) U3.6(Q2)
N212516: D4.1(K) U3.9(Q3)
N212523: D5.1(K) U3.12(Q4)
N212530: D6.1(K) U3.15(Q5)
N212537: D7.1(K) U3.16(Q6)
N212544: D8.1(K) U3.19(Q7)
N214417: C4.1 C5.1 C6.1 C7.1 C8.1 C9.1 C10.1 C11.1 C12.1 C13.1 C14.1 C15.1 C16.1 C17.1 C18.1 C19.1 C20.1 C21.1 C22.1 C23.1 C24.1 C25.1 C26.1 C27.1 C28.1 C29.1 J4.2
N214590: C4.2 C5.2 C6.2 C7.2 C8.2 C9.2 C10.2 C11.2 C12.2 C13.2 C14.2 C15.2 C16.2 C17.2 C18.2 C19.2 C20.2 C21.2 C22.2 C23.2 C24.2 C25.2 C26.2 C27.2 C28.2 C29.2 J4.1
N225003: U10.6(C\S\) U11.19(O\1\)
N228445: J2.2 U10.4(PA0)
N228449: J2.4 U10.3(PA1)
N228453: J2.6 U10.2(PA2)
N228457: J2.8 U10.1(PA3)
N228461: J2.10 U10.40(PA4)
N228469: J2.14 U10.38(PA6)
N228473: J2.16 U10.37(PA7)
N228490: J2.1 U10.18(PB0)
N228506: J2.3 U10.19(PB1)
N228618: J2.5 U10.20(PB2)
N228630: J2.12 U10.39(PA5)
N228663: J2.7 U10.21(PB3)
N229099: J2.9 U10.22(PB4)
N229336: J2.11 U10.23(PB5)
N229361: J2.13 U10.24(PB6)
N229386: J2.15 U10.25(PB7)
N229775: J2.24 U10.14(PC0)
N229787: J2.26 U10.15(PC1)
N229799: J2.28 U10.16(PC2)
N229812: J2.30 U10.17(PC3)
N229824: J2.23 U10.13(PC4)
N229836: J2.25 U10.12(PC5)
N229848: J2.27 U10.11(PC6)
N229860: J2.29 U10.10(PC7)
N2338711: D4.2(A) R12.2
N2339830: D1.2(A) R9.2
N2340030: D3.2(A) R11.2
N2340231: D8.2(A) R16.2
N2340430: D5.2(A) R13.2
N2340630: D7.2(A) R15.2
N2341231: D2.2(A) R10.2
N2342030: D6.2(A) R14.2

Pads without a net: J1 5 7 9 11 13 14 HOLE1 HOLE2; J2 17 18 19 20 21 22 HOLE1 HOLE2; J3 7 9 10 11 12 13 14 HOLE1 HOLE2; J5 HOLE49 HOLE50; SW1 9 10 11 12 13 14 15 16; SW2 2 4; SW3 1 4; SW4 1 4; SW5 1 4; SW6 1 4; SW7 1 4; SW8 1 4; SW9 1 4; SW10 1 4; SW11 1 4; SW12 1 4; SW13 1 4; SW14 1 4; SW15 1 4; SW16 1 4; SW17 1 4; SW18 1 4; SW19 1 4; SW20 1 4; SW21 1 4; SW22 1 4; SW23 1 4; SW24 1 4; SW25 1 4; SW26 1 4; U4 12; U5 23 30 31 33; U6 3 4 6 7 12 14 15; U7 5 6 8 9 10 11 12 13; U9 11 12 13; U11 12 17 18; U13 11 12; U14 6 7 8 23 24 25 26 27 28 29 30 31; U15 12 13; U16 14 15 16 17 18 19; U20 3 5 7 8 9 11 12 13 15 17; U23 10; U25 10; U27 8 9 11 17 18 19; U30 30; U33 30; U34 1 16 19 22; U35 17 23 24 29 31 34; U36 12 13 14 15

## Via types
v1: diameter 0.61, hole 0.33, TOP to BOTTOM, 535 vias

## Routing (per net, layer and track width the routed paths; a pad name or vN(x,y) marks a point on that pad's centre or on a via; arc(x,y) is an arc through that point)
VCC: length 3232.6
  TOP w0.508: 145.21,261.75 145.21,267.33 91.44,267.33 U10.26 ; 145.21,261.75 v1(149.86,261.75) 149.86,262.43 v1(205.74,262.43) ; 145.21,261.75 v1(145.21,260.31) ; U32.28 v1(261.72,271.78) ; U2.20 245.26,55.88 245.26,55.4 v1(242.8,55.4) ; U16.20 109.22,179.7 130.66,179.7 130.66,186.54 152.4,186.54 ; U7.14 236.22,131.13 v1(250.77,131.13) ; U35.40 v1(228.05,162.56) ; v1(228.05,168.41) 205.74,168.41 v1(205.74,173.3) 187.96,173.3 187.96,173.99 ; U13.20 v1(234.8,78.74) 198.12,78.74 R8.2 ; 111.76,129.54 111.76,125.32 179.71,125.32 v1(179.71,123.62) 179.71,99.06 220.98,99.06 ; U18.20 149.86,118.49 v1(146.58,118.49) v1(120.8,118.49) 119.38,118.49 U17.20 ; v1(177.06,176.38) 161.44,176.38 ; 161.44,176.38 147.32,176.38 147.32,182.88 ; 161.44,176.38 161.44,167.64 162.56,167.64 ; v1(140.82,155.47) 20.32,155.47 20.32,149.86 ; R17.1 187.96,173.99 ; 187.96,173.99 v1(177.8,173.99) 177.8,186.54 152.4,186.54 ; 116.84,259.08 116.84,261.52 v1(133.88,261.52) ; 127,129.54 127,132.66 v1(142.24,132.66) ; v1(255.42,131.13) 269.24,131.13 R20.1 ; D9.1 185.42,138.62 v1(178.23,138.62) ; 152.4,186.54 U20.20 ; U26.20 218.44,227.48 ; 218.44,227.48 205.74,227.48 v1(205.74,228.9) ; 218.44,227.48 232.26,227.48 232.26,230.35 245.59,230.35 245.59,229.72 v1(251.46,229.72) 256.54,229.72 U27.20 ; v1(255.42,140.65) 281.94,140.65 R25.2 ; U11.20 60.96,237.34 64.62,237.34 64.62,232.56 67.16,232.56 67.16,236.22 v1(145.21,236.22) U9.20 ; R2.2 198.12,21.27 175.58,21.27 175.58,17.97 91.44,17.97 U4.20 ; v1(140.82,131.34) 129.54,131.34 129.54,129.54 ; U19.20 119.38,135.74 104.95,135.74 v1(104.95,137.11) 58.42,137.11 U15.20 58.42,131.24 v1(42.57,131.24) 15.24,131.24 U14.40 ; U34.12 266.7,187.96 224.74,187.96 224.74,182.88 v1(228.05,182.88) U36.20 ; 134.62,144.78 134.62,146.53 v1(30.48,146.53) ; U22.20 15.24,184.63 23.98,184.63 23.98,181.13 48.26,181.13 U24.20 ; v1(203.2,151.87) 176.38,151.87 176.38,153.52 170.18,153.52 170.18,152.4 ; v1(173.84,252.2) 159.79,252.2 159.79,252.5 152.93,252.5 152.93,252.43 63.5,252.43 63.5,256.54 ; 236.22,218.44 236.22,220.93 v1(128.12,220.93) ; 55.88,256.54 55.88,249.71 v1(102.72,249.71) ; v1(170.18,156.06) 195.58,156.06 195.58,154.94 ; 233.68,76.2 v1(221.79,76.2) ; U21.20 v1(146.58,134.62)
  GND w0.508: 109.22,161.64 U5.40 ; U5.40 109.22,163.48 ; U5.40 110.14,162.56 ; U5.40 108.3,162.56 ; U27.20 257.46,228.6 ; U27.20 255.62,228.6 ; U27.20 256.54,227.68 ; U27.20 256.54,229.52 ; R3.2 198.12,28.69 ; R3.2 197.37,27.94 ; R3.2 198.12,27.19 ; R3.2 198.87,27.94 ; D9.1 186.3,139.7 ; D9.1 184.54,139.7 ; D9.1 185.42,138.82 ; D9.1 185.42,140.58 ; U18.20 149.86,115.22 ; U18.20 148.94,114.3 ; U18.20 150.78,114.3 ; U18.20 149.86,113.38 ; 187.21,177.8 R17.1 ; R17.1 188.71,177.8 ; R17.1 187.96,178.55 ; R17.1 187.96,177.05 ; 204.82,238.76 U33.1 ; U33.1 205.74,237.84 ; U33.1 205.74,239.68 ; U33.1 206.66,238.76 ; R6.2 198.12,51.55 ; R6.2 197.37,50.8 ; R6.2 198.12,50.05 ; R6.2 198.87,50.8 ; U6.18 177.8,158.4 ; U6.18 178.72,157.48 ; U6.18 177.8,156.56 ; U6.18 176.88,157.48 ; R1.2 198.87,12.7 ; R1.2 198.12,11.95 ; R1.2 197.37,12.7 ; R1.2 198.12,13.45 ; 245.46,162.56 U35.40 ; U35.40 246.38,163.48 ; U35.40 247.3,162.56 ; U35.40 246.38,161.64 ; 235.3,121.92 U7.14 ; U7.14 236.22,121 ; U7.14 237.14,121.92 ; U7.14 236.22,122.84 ; U30.32 251.46,254.92 ; U30.32 250.54,254 ; U30.32 252.38,254 ; U30.32 251.46,253.08 ; 14.32,106.68 U14.40 ; U14.40 16.16,106.68 ; U14.40 15.24,107.6 ; U14.40 15.24,105.76 ; R5.2 198.87,43.18 ; R5.2 198.12,42.43 ; R5.2 198.12,43.93 ; R5.2 197.37,43.18 ; 265.78,193.04 U34.12 ; U34.12 266.7,193.96 ; U34.12 267.62,193.04 ; U34.12 266.7,192.12 ; R8.2 198.87,66.04 ; R8.2 198.12,66.79 ; R8.2 198.12,65.29 ; R8.2 197.37,66.04 ; U29.28 264.16,287.94 ; U29.28 264.16,286.1 ; U29.28 265.08,287.02 ; U29.28 263.24,287.02 ; U20.20 153.32,185.42 ; U20.20 151.48,185.42 ; U20.20 152.4,186.34 ; U20.20 152.4,184.5 ; 197.37,20.32 R2.2 ; R2.2 198.87,20.32 ; R2.2 198.12,19.57 ; R2.2 198.12,21.07 ; 232.76,106.68 U12.28 ; U12.28 233.68,105.76 ; U12.28 233.68,107.6 ; U12.28 234.6,106.68 ; U22.20 16.16,182.88 ; U22.20 14.32,182.88 ; U22.20 15.24,183.8 ; U22.20 15.24,181.96 ; U1.20 247.3,38.1 ; U1.20 246.38,39.02 ; U1.20 246.38,37.18 ; U1.20 245.46,38.1 ; 268.49,114.3 R22.1 ; R22.1 269.24,113.55 ; R22.1 269.99,114.3 ; R22.1 269.24,115.05 ; 108.3,185.42 U16.20 ; U16.20 109.22,186.34 ; U16.20 110.14,185.42 ; U16.20 109.22,184.5 ; 204.82,254 U33.32 ; U33.32 206.66,254 ; U33.32 205.74,254.92 ; U33.32 205.74,253.08 ; U3.20 91.44,64.42 ; U3.20 91.44,62.58 ; U3.20 92.36,63.5 ; U3.20 90.52,63.5 ; U9.20 150.78,236.22 ; U9.20 149.86,235.3 ; U9.20 148.94,236.22 ; U9.20 149.86,237.14 ; R4.2 198.12,36.31 ; R4.2 198.12,34.81 ; R4.2 197.37,35.56 ; R4.2 198.87,35.56 ; U19.20 120.3,134.62 ; U19.20 119.38,135.54 ; U19.20 119.38,133.7 ; U19.20 118.46,134.62 ; U26.20 219.36,228.6 ; U26.20 218.44,227.68 ; U26.20 218.44,229.52 ; U26.20 217.52,228.6 ; 197.37,58.42 R7.2 ; R7.2 198.12,59.17 ; R7.2 198.87,58.42 ; R7.2 198.12,57.67 ; U36.20 239.68,182.88 ; U36.20 238.76,183.8 ; U36.20 237.84,182.88 ; U36.20 238.76,181.96 ; U28.28 211.74,287.02 ; U28.28 210.82,286.1 ; U28.28 210.82,287.94 ; U28.28 209.9,287.02 ; 149.86,268.32 U8.24 ; U8.24 149.86,270.16 ; U8.24 150.78,269.24 ; U8.24 148.94,269.24 ; 148.94,134.62 U21.20 ; U21.20 149.86,135.54 ; U21.20 149.86,133.7 ; U21.20 150.78,134.62 ; U17.20 119.38,115.22 ; U17.20 120.3,114.3 ; U17.20 118.46,114.3 ; U17.20 119.38,113.38 ; 90.52,269.24 U10.26 ; U10.26 91.44,268.32 ; U10.26 92.36,269.24 ; U10.26 91.44,270.16 ; U11.20 60.96,242.22 ; U11.20 60.96,240.38 ; U11.20 61.88,241.3 ; U11.20 60.04,241.3 ; U4.20 91.44,21.24 ; U4.20 91.44,19.4 ; U4.20 90.52,20.32 ; U4.20 92.36,20.32 ; U32.28 265.08,271.78 ; U32.28 264.16,270.86 ; U32.28 263.24,271.78 ; U32.28 264.16,272.7 ; U13.20 244.76,78.74 ; U13.20 243.84,79.66 ; U13.20 242.92,78.74 ; U13.20 243.84,77.82 ; U30.1 252.38,238.76 ; U30.1 251.46,237.84 ; U30.1 250.54,238.76 ; U30.1 251.46,239.68 ; 48.26,181.96 U24.20 ; U24.20 48.26,183.8 ; U24.20 49.18,182.88 ; U24.20 47.34,182.88 ; U31.28 210.82,270.16 ; U31.28 211.74,269.24 ; U31.28 209.9,269.24 ; U31.28 210.82,268.32 ; 57.5,134.62 U15.20 ; U15.20 59.34,134.62 ; U15.20 58.42,133.7 ; U15.20 58.42,135.54 ; R25.2 282.69,139.7 ; R25.2 281.19,139.7 ; R25.2 281.94,138.95 ; R25.2 281.94,140.45 ; U2.20 247.3,55.88 ; U2.20 246.38,54.96 ; U2.20 245.46,55.88 ; U2.20 246.38,56.8 ; R20.1 269.24,130.29 ; R20.1 268.49,129.54 ; R20.1 269.99,129.54 ; R20.1 269.24,128.79
  POWER w0.508: 151.48,185.42 U20.20 ; U20.20 153.32,185.42 ; U20.20 152.4,184.5 ; U20.20 152.4,186.34 ; 48.26,181.96 U24.20 ; U24.20 49.18,182.88 ; U24.20 47.34,182.88 ; U24.20 48.26,183.8 ; 148.94,236.22 U9.20 ; U9.20 149.86,237.14 ; U9.20 149.86,235.3 ; U9.20 150.78,236.22 ; 245.46,55.88 U2.20 ; U2.20 246.38,56.8 ; U2.20 246.38,54.96 ; U2.20 247.3,55.88 ; 235.3,121.92 U7.14 ; U7.14 236.22,122.84 ; U7.14 236.22,121 ; U7.14 237.14,121.92 ; 218.44,227.68 U26.20 ; U26.20 218.44,229.52 ; U26.20 219.36,228.6 ; U26.20 217.52,228.6 ; U33.32 206.66,254 ; U33.32 205.74,254.92 ; U33.32 205.74,253.08 ; U33.32 204.82,254 ; U8.24 150.78,269.24 ; U8.24 149.86,268.32 ; U8.24 148.94,269.24 ; U8.24 149.86,270.16 ; U29.28 265.08,287.02 ; U29.28 264.16,286.1 ; U29.28 264.16,287.94 ; U29.28 263.24,287.02 ; 210.82,286.1 U28.28 ; U28.28 211.74,287.02 ; U28.28 209.9,287.02 ; U28.28 210.82,287.94 ; 60.04,241.3 U11.20 ; U11.20 60.96,240.38 ; U11.20 61.88,241.3 ; U11.20 60.96,242.22 ; U18.20 150.78,114.3 ; U18.20 148.94,114.3 ; U18.20 149.86,115.22 ; U18.20 149.86,113.38 ; 176.88,157.48 U6.18 ; U6.18 178.72,157.48 ; U6.18 177.8,156.56 ; U6.18 177.8,158.4 ; 198.12,27.19 R3.2 ; R3.2 198.87,27.94 ; R3.2 198.12,28.69 ; R3.2 197.37,27.94 ; 281.94,138.95 R25.2 ; R25.2 281.94,140.45 ; R25.2 282.69,139.7 ; R25.2 281.19,139.7 ; 197.37,35.56 R4.2 ; R4.2 198.87,35.56 ; R4.2 198.12,34.81 ; R4.2 198.12,36.31 ; 198.12,19.57 R2.2 ; R2.2 197.37,20.32 ; R2.2 198.12,21.07 ; R2.2 198.87,20.32 ; 198.12,50.05 R6.2 ; R6.2 197.37,50.8 ; R6.2 198.12,51.55 ; R6.2 198.87,50.8 ; U5.40 110.14,162.56 ; U5.40 108.3,162.56 ; U5.40 109.22,163.48 ; U5.40 109.22,161.64 ; 198.12,57.67 R7.2 ; R7.2 198.12,59.17 ; R7.2 197.37,58.42 ; R7.2 198.87,58.42 ; 210.82,268.32 U31.28 ; U31.28 209.9,269.24 ; U31.28 210.82,270.16 ; U31.28 211.74,269.24 ; 118.46,114.3 U17.20 ; U17.20 119.38,115.22 ; U17.20 120.3,114.3 ; U17.20 119.38,113.38 ; 90.52,63.5 U3.20 ; U3.20 91.44,64.42 ; U3.20 91.44,62.58 ; U3.20 92.36,63.5 ; U30.1 251.46,239.68 ; U30.1 252.38,238.76 ; U30.1 251.46,237.84 ; U30.1 250.54,238.76 ; R22.1 269.99,114.3 ; R22.1 269.24,115.05 ; R22.1 268.49,114.3 ; R22.1 269.24,113.55 ; 57.5,134.62 U15.20 ; U15.20 59.34,134.62 ; U15.20 58.42,133.7 ; U15.20 58.42,135.54 ; 198.12,65.29 R8.2 ; R8.2 198.12,66.79 ; R8.2 198.87,66.04 ; R8.2 197.37,66.04 ; U36.20 238.76,183.8 ; U36.20 237.84,182.88 ; U36.20 239.68,182.88 ; U36.20 238.76,181.96 ; 184.54,139.7 D9.1 ; D9.1 186.3,139.7 ; D9.1 185.42,138.82 ; D9.1 185.42,140.58 ; U19.20 119.38,135.54 ; U19.20 120.3,134.62 ; U19.20 119.38,133.7 ; U19.20 118.46,134.62 ; 232.76,106.68 U12.28 ; U12.28 234.6,106.68 ; U12.28 233.68,107.6 ; U12.28 233.68,105.76 ; R17.1 188.71,177.8 ; R17.1 187.96,177.05 ; R17.1 187.96,178.55 ; R17.1 187.21,177.8 ; R1.2 198.12,13.45 ; R1.2 198.12,11.95 ; R1.2 197.37,12.7 ; R1.2 198.87,12.7 ; U33.1 206.66,238.76 ; U33.1 205.74,237.84 ; U33.1 205.74,239.68 ; U33.1 204.82,238.76 ; 90.52,269.24 U10.26 ; U10.26 91.44,268.32 ; U10.26 92.36,269.24 ; U10.26 91.44,270.16 ; U35.40 246.38,163.48 ; U35.40 246.38,161.64 ; U35.40 245.46,162.56 ; U35.40 247.3,162.56 ; 15.24,105.76 U14.40 ; U14.40 16.16,106.68 ; U14.40 14.32,106.68 ; U14.40 15.24,107.6 ; 263.24,271.78 U32.28 ; U32.28 264.16,270.86 ; U32.28 264.16,272.7 ; U32.28 265.08,271.78 ; 255.62,228.6 U27.20 ; U27.20 257.46,228.6 ; U27.20 256.54,229.52 ; U27.20 256.54,227.68 ; 250.54,254 U30.32 ; U30.32 252.38,254 ; U30.32 251.46,254.92 ; U30.32 251.46,253.08 ; U16.20 110.14,185.42 ; U16.20 109.22,184.5 ; U16.20 108.3,185.42 ; U16.20 109.22,186.34 ; 269.24,128.79 R20.1 ; R20.1 268.49,129.54 ; R20.1 269.99,129.54 ; R20.1 269.24,130.29 ; U34.12 266.7,193.96 ; U34.12 266.7,192.12 ; U34.12 267.62,193.04 ; U34.12 265.78,193.04 ; 14.32,182.88 U22.20 ; U22.20 15.24,183.8 ; U22.20 16.16,182.88 ; U22.20 15.24,181.96 ; 91.44,19.4 U4.20 ; U4.20 90.52,20.32 ; U4.20 92.36,20.32 ; U4.20 91.44,21.24 ; R5.2 198.87,43.18 ; R5.2 198.12,42.43 ; R5.2 198.12,43.93 ; R5.2 197.37,43.18 ; 243.84,77.82 U13.20 ; U13.20 243.84,79.66 ; U13.20 242.92,78.74 ; U13.20 244.76,78.74 ; U1.20 247.3,38.1 ; U1.20 246.38,37.18 ; U1.20 246.38,39.02 ; U1.20 245.46,38.1 ; U21.20 150.78,134.62 ; U21.20 149.86,135.54 ; U21.20 148.94,134.62 ; U21.20 149.86,133.7
  BOTTOM w0.508: 251.46,252.88 U30.1 v1(251.46,229.72) ; 251.46,252.88 255.12,252.88 255.12,260.17 261.72,260.17 v1(261.72,271.78) 261.72,287.02 U29.28 ; 251.46,252.88 U30.32 ; 170.18,167.64 v1(170.18,156.06) ; 209.7,271.04 209.7,269.24 U31.28 ; 209.7,271.04 205.74,271.04 v1(205.74,262.43) U33.32 U33.1 v1(205.74,228.9) v1(205.74,173.3) ; 209.7,271.04 209.7,287.02 U28.28 ; R1.2 R2.2 R3.2 R4.2 R5.2 R6.2 R7.2 R8.2 ; 234.8,106.68 234.8,121.92 U7.14 ; 234.8,106.68 v1(234.8,78.74) ; 234.8,106.68 U12.28 ; v1(104.95,137.11) 104.95,162.56 108.1,162.56 ; U4.20 90.32,20.32 90.32,63.5 U3.20 ; 101.6,266.7 102.72,266.7 v1(102.72,249.71) ; 147.32,259.08 147.32,261.52 v1(133.88,261.52) ; 172.72,129.54 172.72,123.95 177.06,123.95 v1(177.06,176.38) ; v1(250.77,131.13) v1(255.42,131.13) v1(255.42,140.65) 255.42,153.22 246.38,153.22 U35.40 ; 139.7,137.16 140.82,137.16 ; 140.82,137.16 v1(140.82,131.34) ; 140.82,137.16 140.82,149.81 139.7,149.81 139.7,152.4 ; U1.20 242.8,38.1 v1(242.8,55.4) 242.8,63.07 242.72,63.07 242.72,78.74 U13.20 ; v1(228.05,162.56) v1(228.05,168.41) v1(228.05,182.88) ; v1(177.8,173.99) U6.18 177.8,153.52 178.92,153.52 178.92,148.64 178.23,148.64 v1(178.23,138.62) ; v1(42.57,131.24) 42.57,182.88 U24.20 ; 223.52,42.8 223.52,15.24 226.06,15.24 ; 223.52,42.8 223.52,48.26 ; 223.52,42.8 221.79,42.8 v1(221.79,76.2) 220.98,76.2 220.98,99.06 ; 203.2,154.94 v1(203.2,151.87) ; 30.48,142.24 v1(30.48,146.53) ; R22.1 267.65,114.3 267.65,129.54 R20.1 ; v1(145.21,236.22) v1(145.21,260.31) ; 175.26,269.24 173.84,269.24 v1(173.84,252.2) ; U16.20 108.1,185.42 108.1,162.56 ; U5.40 108.1,162.56 ; v1(140.82,155.47) 140.82,150.45 142.24,150.45 142.24,144.78 ; v1(142.24,132.66) 142.24,137.16 143.36,137.16 143.36,145.9 142.88,145.9 142.88,151.08 142.24,151.08 142.24,152.4 ; U8.24 v1(149.86,261.75) ; 195.58,147.32 194.16,147.32 194.16,156.69 183.57,156.69 183.57,140.74 180.34,140.74 180.34,124.94 179.71,124.94 v1(179.71,123.62) ; v1(128.12,220.93) 128.12,175.26 127,175.26 ; U19.20 118.26,134.62 118.26,118.49 v1(120.8,118.49) ; v1(146.58,134.62) v1(146.58,118.49)
A0: length 674.5
  TOP w0.508: 148.11,107.8 v1(148.11,109.12) ; 148.11,107.8 148.11,98.37 221.79,98.37 v1(221.79,97.64) ; 148.11,107.8 63.5,107.8 U14.21 ; v1(158.9,229.97) 60.96,229.97 U11.1 ; U13.13 261.62,77.57 v1(247.21,77.57) v1(221.79,77.57) ; v1(163.73,213.16) v1(239.88,213.16) 266.7,213.16 U27.5 ; v1(228.79,175.26) U36.1 ; v1(58.42,121.72) v1(63.5,121.72)
  BOTTOM w0.508: U2.1 245.26,48.26 245.26,77.57 v1(247.21,77.57) ; 163.73,229.97 v1(158.9,229.97) ; 163.73,229.97 165.1,229.97 U9.14 ; 163.73,229.97 v1(163.73,213.16) ; U15.1 v1(58.42,121.72) ; U36.1 239.88,175.26 v1(239.88,213.16) ; v1(228.79,175.26) 228.79,135 221.79,135 v1(221.79,97.64) v1(221.79,77.57) ; v1(148.11,109.12) 152.4,109.12 U18.19 ; v1(63.5,121.72) U14.21
A1: length 869.5
  TOP w0.508: v1(169.01,130.18) 178.28,130.18 178.28,128.55 v1(225.02,128.55) v1(235.1,128.55) ; v1(229.72,266.22) 228.6,266.22 U31.21 ; U18.16 160.02,118.01 v1(169.01,118.01) ; U8.20 160.02,274.32 ; 160.02,274.32 201.7,274.32 201.7,285.52 228.6,285.52 U28.21 ; 160.02,274.32 v1(77.57,274.32) ; U30.12 279.4,237.64 ; 279.4,237.64 279.4,235 v1(235.74,235) v1(233.68,235) ; 279.4,237.64 295.76,237.64 295.76,283.06 281.94,283.06 U29.21 ; U4.13 109.22,22.66 v1(234.72,22.66) ; U12.27 236.22,109.27 v1(225.02,109.27) ; v1(234.72,47.14) 248.92,47.14 U2.2
  BOTTOM w0.508: v1(169.01,118.01) v1(169.01,130.18) ; U28.21 227.48,287.02 227.48,276.07 228.6,276.07 U31.21 ; U32.21 281.94,276.71 280.82,276.71 280.82,287.02 U29.21 ; v1(235.1,128.55) 235.1,224 236.22,224 U26.13 236.22,230.35 235.74,230.35 v1(235.74,235) ; v1(229.72,266.22) 229.72,244.32 233.68,244.32 U33.12 v1(233.68,235) ; U10.9 77.57,254 v1(77.57,274.32) ; v1(234.72,22.66) v1(234.72,47.14) 234.72,76.66 225.02,76.66 v1(225.02,109.27) v1(225.02,128.55)
A2: length 1047.8
  TOP w0.508: U8.19 162.56,268.12 ; 162.56,268.12 v1(207.16,268.12) 223.52,268.12 U31.23 ; 162.56,268.12 158.6,268.12 158.6,270.36 v1(105.26,270.36) ; v1(207.16,243) v1(231.14,243) 276.86,243 276.86,242.95 ; v1(194.51,82.65) 259.08,82.65 U13.14 ; 106.68,23.7 v1(194.51,23.7) ; 106.68,23.7 v1(87.68,23.7) ; 106.68,23.7 U4.14 ; U32.23 276.86,273.53 293.22,273.53 293.22,242.95 276.86,242.95 ; v1(87.68,131.95) 74.93,131.95 74.93,131.27 60.96,131.27 U15.2 ; 276.86,242.95 U30.11 ; v1(172.03,111.02) 162.56,111.02 U18.15 ; v1(200.51,234.31) v1(232.51,234.31)
  BOTTOM w0.508: v1(231.14,243) U33.11 232.51,238.76 v1(232.51,234.31) 233.2,234.31 233.2,234.06 233.68,234.06 U26.14 ; U31.23 223.52,272.26 222.73,272.26 222.73,277.34 222.4,277.34 222.4,287.02 U28.23 ; v1(194.51,23.7) v1(194.51,82.65) 194.51,104.24 ; v1(172.03,111.02) 175.74,111.02 175.74,104.24 194.51,104.24 ; v1(200.51,234.31) 200.51,136.58 194.51,136.58 194.51,104.24 ; U32.23 277.98,271.78 277.98,287.02 U29.23 ; v1(207.16,243) v1(207.16,268.12) ; v1(105.26,270.36) 105.26,248.39 73.66,248.39 U10.8 ; U2.3 252.58,48.26 252.58,75.46 259.08,75.46 U13.14 ; v1(87.68,131.95) v1(87.68,23.7)
A3: length 1008
  TOP w0.508: U2.4 254,50.75 v1(242.09,50.75) ; U15.3 63.5,128.17 v1(78.05,128.17) ; U11.2 63.5,231.93 162.56,231.93 U9.15 ; v1(204.47,80.54) v1(242.09,80.54) 256.54,80.54 U13.15 ; v1(225.37,241.1) v1(230.45,241.1) 274.32,241.1 U30.10 ; U26.15 231.14,231.04 202.51,231.04 v1(202.51,232.26) v1(166.22,232.26) ; v1(183.57,103.23) v1(203.2,103.23) ; v1(220.29,263.42) 229.72,263.42 229.72,260.17 v1(228.5,260.17)
  BOTTOM w0.508: U18.12 171.3,114.3 171.3,103.23 v1(183.57,103.23) ; v1(202.51,232.26) 202.51,103.23 v1(203.2,103.23) 203.2,80.54 v1(204.47,80.54) 204.47,10.9 110.34,10.9 110.34,13.82 107.8,13.82 ; 107.8,13.82 107.8,10.95 79.86,10.95 79.86,128.17 v1(78.05,128.17) ; 107.8,13.82 107.8,16.99 104.14,16.99 U4.15 ; U29.24 275.44,287.02 275.44,275.44 274.32,275.44 U32.24 274.32,269.72 275.44,269.72 275.44,245.59 274.32,245.59 U30.10 ; 229.72,238.76 229.72,241.1 v1(230.45,241.1) ; 229.72,238.76 U33.10 ; 229.72,238.76 229.72,234.9 231.14,234.9 U26.15 ; v1(228.5,260.17) 228.5,256.39 227.18,256.39 227.18,250.19 225.37,250.19 v1(225.37,241.1) ; U28.24 219.86,287.02 219.86,274.17 220.98,274.17 U31.24 220.98,268.02 220.29,268.02 v1(220.29,263.42) ; U9.15 162.56,237.97 166.22,237.97 v1(166.22,232.26) ; v1(242.09,50.75) v1(242.09,80.54)
A4: length 921.5
  TOP w0.508: 232.56,81.23 v1(255.37,81.23) ; 232.56,81.23 v1(170.18,81.23) v1(102.72,81.23) ; 232.56,81.23 v1(232.56,81.92) ; v1(208.97,270.36) 218.44,270.36 U31.25 ; v1(271.78,246.33) v1(226.36,246.33) v1(209.65,246.33) 199.49,246.33 199.49,248.82 v1(160.02,248.82) ; U11.3 66.04,237.34 160.02,237.34 U9.16 ; v1(101.6,24.61) 101.6,26.62 v1(102.72,26.62) ; U36.2 241.3,176.38 v1(233.68,176.38) 228.74,176.38 228.74,178.44 v1(209.45,178.44) ; v1(66.04,123.09) v1(102.72,123.09)
  BOTTOM w0.508: U4.16 v1(101.6,24.61) ; v1(102.72,123.09) v1(102.72,81.23) v1(102.72,26.62) ; v1(232.56,81.92) 232.56,160.93 233.68,160.93 v1(233.68,176.38) ; v1(226.36,246.33) 226.36,241.05 226.06,241.05 U33.9 226.06,232.26 228.6,232.26 U26.16 ; v1(160.02,248.82) U9.16 ; U13.16 254,81.23 v1(255.37,81.23) 260.2,81.23 260.2,51.92 256.54,51.92 U2.5 ; U15.4 v1(66.04,123.09) ; U18.9 v1(170.18,81.23) ; U29.25 272.9,287.02 272.9,277.98 272.41,277.98 272.41,274.17 271.78,274.17 U32.25 271.78,267.82 272.9,267.82 272.9,246.33 v1(271.78,246.33) U30.9 ; v1(208.97,270.36) 208.97,259.18 209.65,259.18 v1(209.65,246.33) 209.65,234.95 209.45,234.95 v1(209.45,178.44) ; U31.25 218.44,274.8 217.32,274.8 217.32,287.02 U28.25
A5: length 947.9
  TOP w0.508: v1(69.62,33.02) 99.06,33.02 v1(99.06,29.26) v1(163.2,29.26) ; v1(215.16,264.79) 215.16,264.11 ; 215.16,264.11 215.16,263.12 v1(158.6,263.12) ; 215.16,264.11 v1(222.1,264.11) ; U9.17 157.48,232.56 68.58,232.56 U11.4 ; v1(163.2,49.43) 163.88,49.43 163.88,49.38 v1(250.09,49.38) 250.09,47.14 259.08,47.14 U2.6 ; v1(232.18,179.12) v1(236.65,179.12) v1(243.84,179.12) ; v1(270.36,247.01) v1(223.52,247.01)
  BOTTOM w0.508: v1(163.2,29.26) v1(163.2,49.43) 163.2,58.37 162.56,58.37 U18.6 ; U13.17 250.34,78.74 ; 250.34,78.74 250.34,126.85 243.99,126.85 243.99,138.87 236.65,138.87 v1(236.65,179.12) ; 250.34,78.74 250.09,78.74 v1(250.09,49.38) ; v1(158.6,263.12) 158.6,236.22 U9.17 ; U15.5 68.58,107.09 69.62,107.09 v1(69.62,33.02) ; U28.26 214.78,287.02 214.78,277.55 215.11,277.55 215.11,271.63 215.9,271.63 U31.26 215.9,264.79 v1(215.16,264.79) ; U30.8 269.24,247.01 v1(270.36,247.01) 270.36,265.91 269.24,265.91 U32.26 269.24,274.17 269.88,274.17 269.88,276.71 270.36,276.71 270.36,287.02 U29.26 ; U36.3 v1(243.84,179.12) ; v1(222.1,264.11) 222.1,255.12 224.64,255.12 224.64,247.01 v1(223.52,247.01) U33.8 223.52,230.99 226.06,230.99 U26.17 227.18,228.6 227.18,215.57 232.18,215.57 v1(232.18,179.12) ; U4.17 v1(99.06,29.26)
A6: length 856.1
  TOP w0.508: U2.7 261.62,52.07 v1(247.8,52.07) ; U26.18 223.52,229.77 v1(220.98,229.77) ; U36.4 246.38,177.06 v1(230.01,177.06) ; v1(153.82,261.62) U31.1 210.82,260.22 v1(219.56,260.22) ; U33.7 220.98,239.88 266.7,239.88 U30.7 ; U9.18 154.94,234.8 71.12,234.8 U11.5 ; v1(71.12,123.78) v1(97.64,123.78) ; v1(243.15,88.47) v1(229.27,88.47) 160.02,88.47 v1(160.02,87.73) v1(97.64,87.73)
  BOTTOM w0.508: U18.5 v1(160.02,87.73) ; 263.04,264.16 263.04,246.91 266.7,246.91 U30.7 ; 263.04,264.16 263.04,279.4 U29.1 ; 263.04,264.16 U32.1 ; v1(97.64,123.78) v1(97.64,87.73) 97.64,20.32 U4.18 ; v1(229.27,88.47) 230.01,88.47 v1(230.01,177.06) 230.01,211.61 224.64,211.61 224.64,228.6 U26.18 ; U15.6 v1(71.12,123.78) ; v1(247.8,52.07) 247.8,74.78 248.92,74.78 U13.18 248.92,88.47 v1(243.15,88.47) ; U9.18 154.94,245.29 153.82,245.29 v1(153.82,261.62) ; v1(220.98,229.77) U33.7 220.98,246.87 219.56,246.87 v1(219.56,260.22) ; U28.1 210.82,271.63 211.94,271.63 211.94,261.62 U31.1
A7: length 891.7
  TOP w0.508: v1(152.4,90.07) v1(126.26,90.07) v1(73.66,90.07) ; v1(114.3,54.68) 125.58,54.68 125.58,54.94 v1(126.26,54.94) 126.26,52.76 264.16,52.76 U2.8 ; v1(73.66,224.05) v1(170.18,224.05) ; v1(265.58,251.66) v1(262.36,251.66) ; U36.5 248.92,178.38 v1(237.64,178.38) ; v1(170.18,235.05) 218.44,235.05 v1(218.44,235.74) v1(238.07,235.74) 264.16,235.74 U30.6
  BOTTOM w0.508: v1(237.64,178.38) 237.64,215.75 239.88,215.75 239.88,228.6 ; 239.88,228.6 239.88,235.74 v1(238.07,235.74) ; 239.88,228.6 U26.11 ; v1(262.36,251.66) 262.36,245.01 264.16,245.01 U30.6 ; U36.5 248.92,167.49 250.04,167.49 250.04,158.93 257.66,158.93 257.66,86.31 263.04,86.31 263.04,71.12 ; U31.2 214.48,261.62 ; 214.48,261.62 214.48,275.64 213.36,275.64 U28.2 ; 214.48,261.62 214.48,241.15 215.11,241.15 215.11,239.88 218.44,239.88 U33.6 v1(218.44,235.74) ; U18.2 v1(152.4,90.07) ; 265.58,264.16 265.58,279.4 U29.2 ; 265.58,264.16 v1(265.58,251.66) ; 265.58,264.16 U32.2 ; 263.04,71.12 U13.9 ; 263.04,71.12 263.04,48.26 U2.8 ; U15.7 v1(73.66,90.07) ; v1(170.18,235.05) U9.9 v1(170.18,224.05) ; U4.11 v1(114.3,54.68) ; U11.6 v1(73.66,224.05) ; v1(126.26,54.94) v1(126.26,90.07)
A8: length 903
  TOP w0.508: U13.8 261.62,69.37 267.82,69.37 267.82,69.36 ; U33.5 217.02,238.76 v1(217.02,241.78) v1(260.88,241.78) v1(267.87,241.78) ; U17.19 121.92,112.55 v1(76.2,112.55) ; v1(270.36,177.75) 251.46,177.75 U36.6 ; v1(76.2,226.8) v1(164.41,226.8) ; U9.8 167.64,230.35 v1(215.9,230.35) ; v1(270.36,223.42) 260.2,223.42 260.2,219.23 238.76,219.23 U26.9 ; v1(125.58,46.46) 266.7,46.46 U2.9 267.82,48.26 267.82,69.36 ; 267.82,69.36 v1(275.44,69.36)
  BOTTOM w0.508: U29.3 269.24,276.07 268.12,276.07 268.12,264.16 ; v1(275.44,69.36) 275.44,177.75 v1(270.36,177.75) v1(270.36,223.42) 267.87,223.42 v1(267.87,241.78) 267.87,264.16 268.12,264.16 ; v1(215.9,230.35) U33.5 ; U17.19 121.92,112.24 128.12,112.24 128.12,102.82 125.58,102.82 v1(125.58,46.46) 125.58,16.36 111.76,16.36 U4.9 ; 268.12,264.16 U32.3 ; U15.8 v1(76.2,112.55) ; U30.5 261.62,241.78 v1(260.88,241.78) ; v1(164.41,226.8) 167.64,226.8 U9.8 ; U28.3 215.9,273.53 217.02,273.53 217.02,261.62 ; U11.7 v1(76.2,226.8) ; 217.02,261.62 v1(217.02,241.78) ; 217.02,261.62 U31.3
A9: length 902.4
  TOP w0.508: v1(203.94,249.02) v1(217.7,249.02) v1(264.16,249.02) ; U32.4 271.78,262.18 v1(264.16,262.18) ; v1(78.74,226.11) v1(93.98,226.11) 165.1,226.11 165.1,226.75 ; 165.1,226.75 v1(203.94,226.75) ; 165.1,226.75 U9.7 ; U17.16 129.54,111.86 v1(93.98,111.86) ; v1(270.36,176.38) 254,176.38 U36.7 254,174.14 v1(203.94,174.14) ; v1(269.24,72.19) 268.55,72.19 268.55,72.24 259.08,72.24 U13.7 ; U15.9 78.74,131.27 v1(93.98,131.27) ; U26.8 236.22,223 v1(203.94,223)
  BOTTOM w0.508: U15.9 78.74,9.68 109.22,9.68 U4.8 ; U11.8 v1(78.74,226.11) ; v1(93.98,226.11) v1(93.98,131.27) v1(93.98,111.86) ; v1(217.7,249.02) 218.44,249.02 U33.27 U31.4 219.56,261.62 219.56,272.26 219.08,272.26 219.08,276.71 218.44,276.71 U28.4 ; v1(264.16,249.02) U30.27 v1(264.16,262.18) ; U2.11 v1(269.24,72.19) 270.36,72.19 v1(270.36,176.38) ; v1(203.94,249.02) v1(203.94,226.75) v1(203.94,223) v1(203.94,174.14) ; U29.4 271.78,275.44 270.66,275.44 270.66,267.18 271.78,267.18 U32.4
A10: length 907.9
  TOP w0.508: 220.98,252.88 U33.26 ; 220.98,252.88 v1(204.62,252.88) ; 220.98,252.88 266.7,252.88 U30.26 ; U2.18 251.46,58.27 ; 251.46,58.27 v1(256.54,58.27) ; 251.46,58.27 v1(238.02,58.27) 238.02,61.7 v1(110.44,61.7) ; v1(162.56,221.68) v1(204.62,221.68) 204.62,222.36 233.68,222.36 U26.7 ; U36.8 256.54,172.19 v1(234.42,172.19) ; v1(81.28,230.66) 162.56,230.66 U9.6 ; U29.5 274.32,277.65 220.98,277.65 U28.5 ; U17.15 132.08,111.18 v1(110.44,111.18) ; U15.11 v1(110.44,134.62)
  BOTTOM w0.508: v1(204.62,252.88) v1(204.62,221.68) ; U11.9 v1(81.28,230.66) ; v1(238.02,58.27) 238.02,82.55 237.34,82.55 237.34,125.58 234.42,125.58 v1(234.42,172.19) 234.42,218.59 233.68,218.59 U26.7 ; U13.6 v1(256.54,58.27) ; U33.26 U31.5 220.98,266.75 222.1,266.75 222.1,276.07 220.98,276.07 U28.5 ; v1(162.56,221.68) U9.6 ; U32.5 274.32,269.09 273.2,269.09 273.2,276.71 274.32,276.71 U29.5 ; v1(110.44,134.62) v1(110.44,111.18) v1(110.44,61.7) 110.44,23.34 103.02,23.34 103.02,15.09 106.68,15.09 U4.7
A11: length 916.8
  TOP w0.508: v1(228.12,233.63) v1(211.94,233.63) 163.68,233.63 ; U4.6 104.14,11.58 v1(138.58,11.58) ; 163.68,233.63 163.68,227.48 160.02,227.48 U9.5 ; 163.68,233.63 163.68,239.88 83.82,239.88 U11.11 ; 228.6,255.8 v1(274.32,255.8) v1(276.86,255.8) ; 228.6,255.8 U33.23 ; 228.6,255.8 v1(224.64,255.8) ; v1(138.58,53.51) 254,53.51 U2.17 ; U13.5 254,68.68 v1(265.28,68.68) ; v1(211.94,171.45) 259.08,171.45 U36.9 ; v1(64.62,119.18) v1(139.7,119.18)
  BOTTOM w0.508: U31.6 224.64,261.62 ; 224.64,261.62 224.64,274.8 223.52,274.8 U28.6 ; 224.64,261.62 v1(224.64,255.8) ; v1(139.7,119.18) U17.12 139.7,109.7 138.58,109.7 v1(138.58,53.51) v1(138.58,11.58) ; v1(211.94,171.45) v1(211.94,233.63) ; U15.18 64.62,134.62 v1(64.62,119.18) ; v1(265.28,68.68) 265.28,109.07 262.31,109.07 262.31,145.36 260.35,145.36 260.35,175.26 U36.9 ; U2.17 U13.5 ; U33.23 228.6,245.59 227.43,245.59 227.43,233.63 v1(228.12,233.63) 229.72,233.63 229.72,220.98 U26.6 ; U29.6 276.86,274.17 275.74,274.17 275.74,270.36 276.86,270.36 U32.6 v1(276.86,255.8) ; U30.23 v1(274.32,255.8)
